# EAGLE board controller-ha-v3 (EAGLE 6.5.0), part 1 of 2
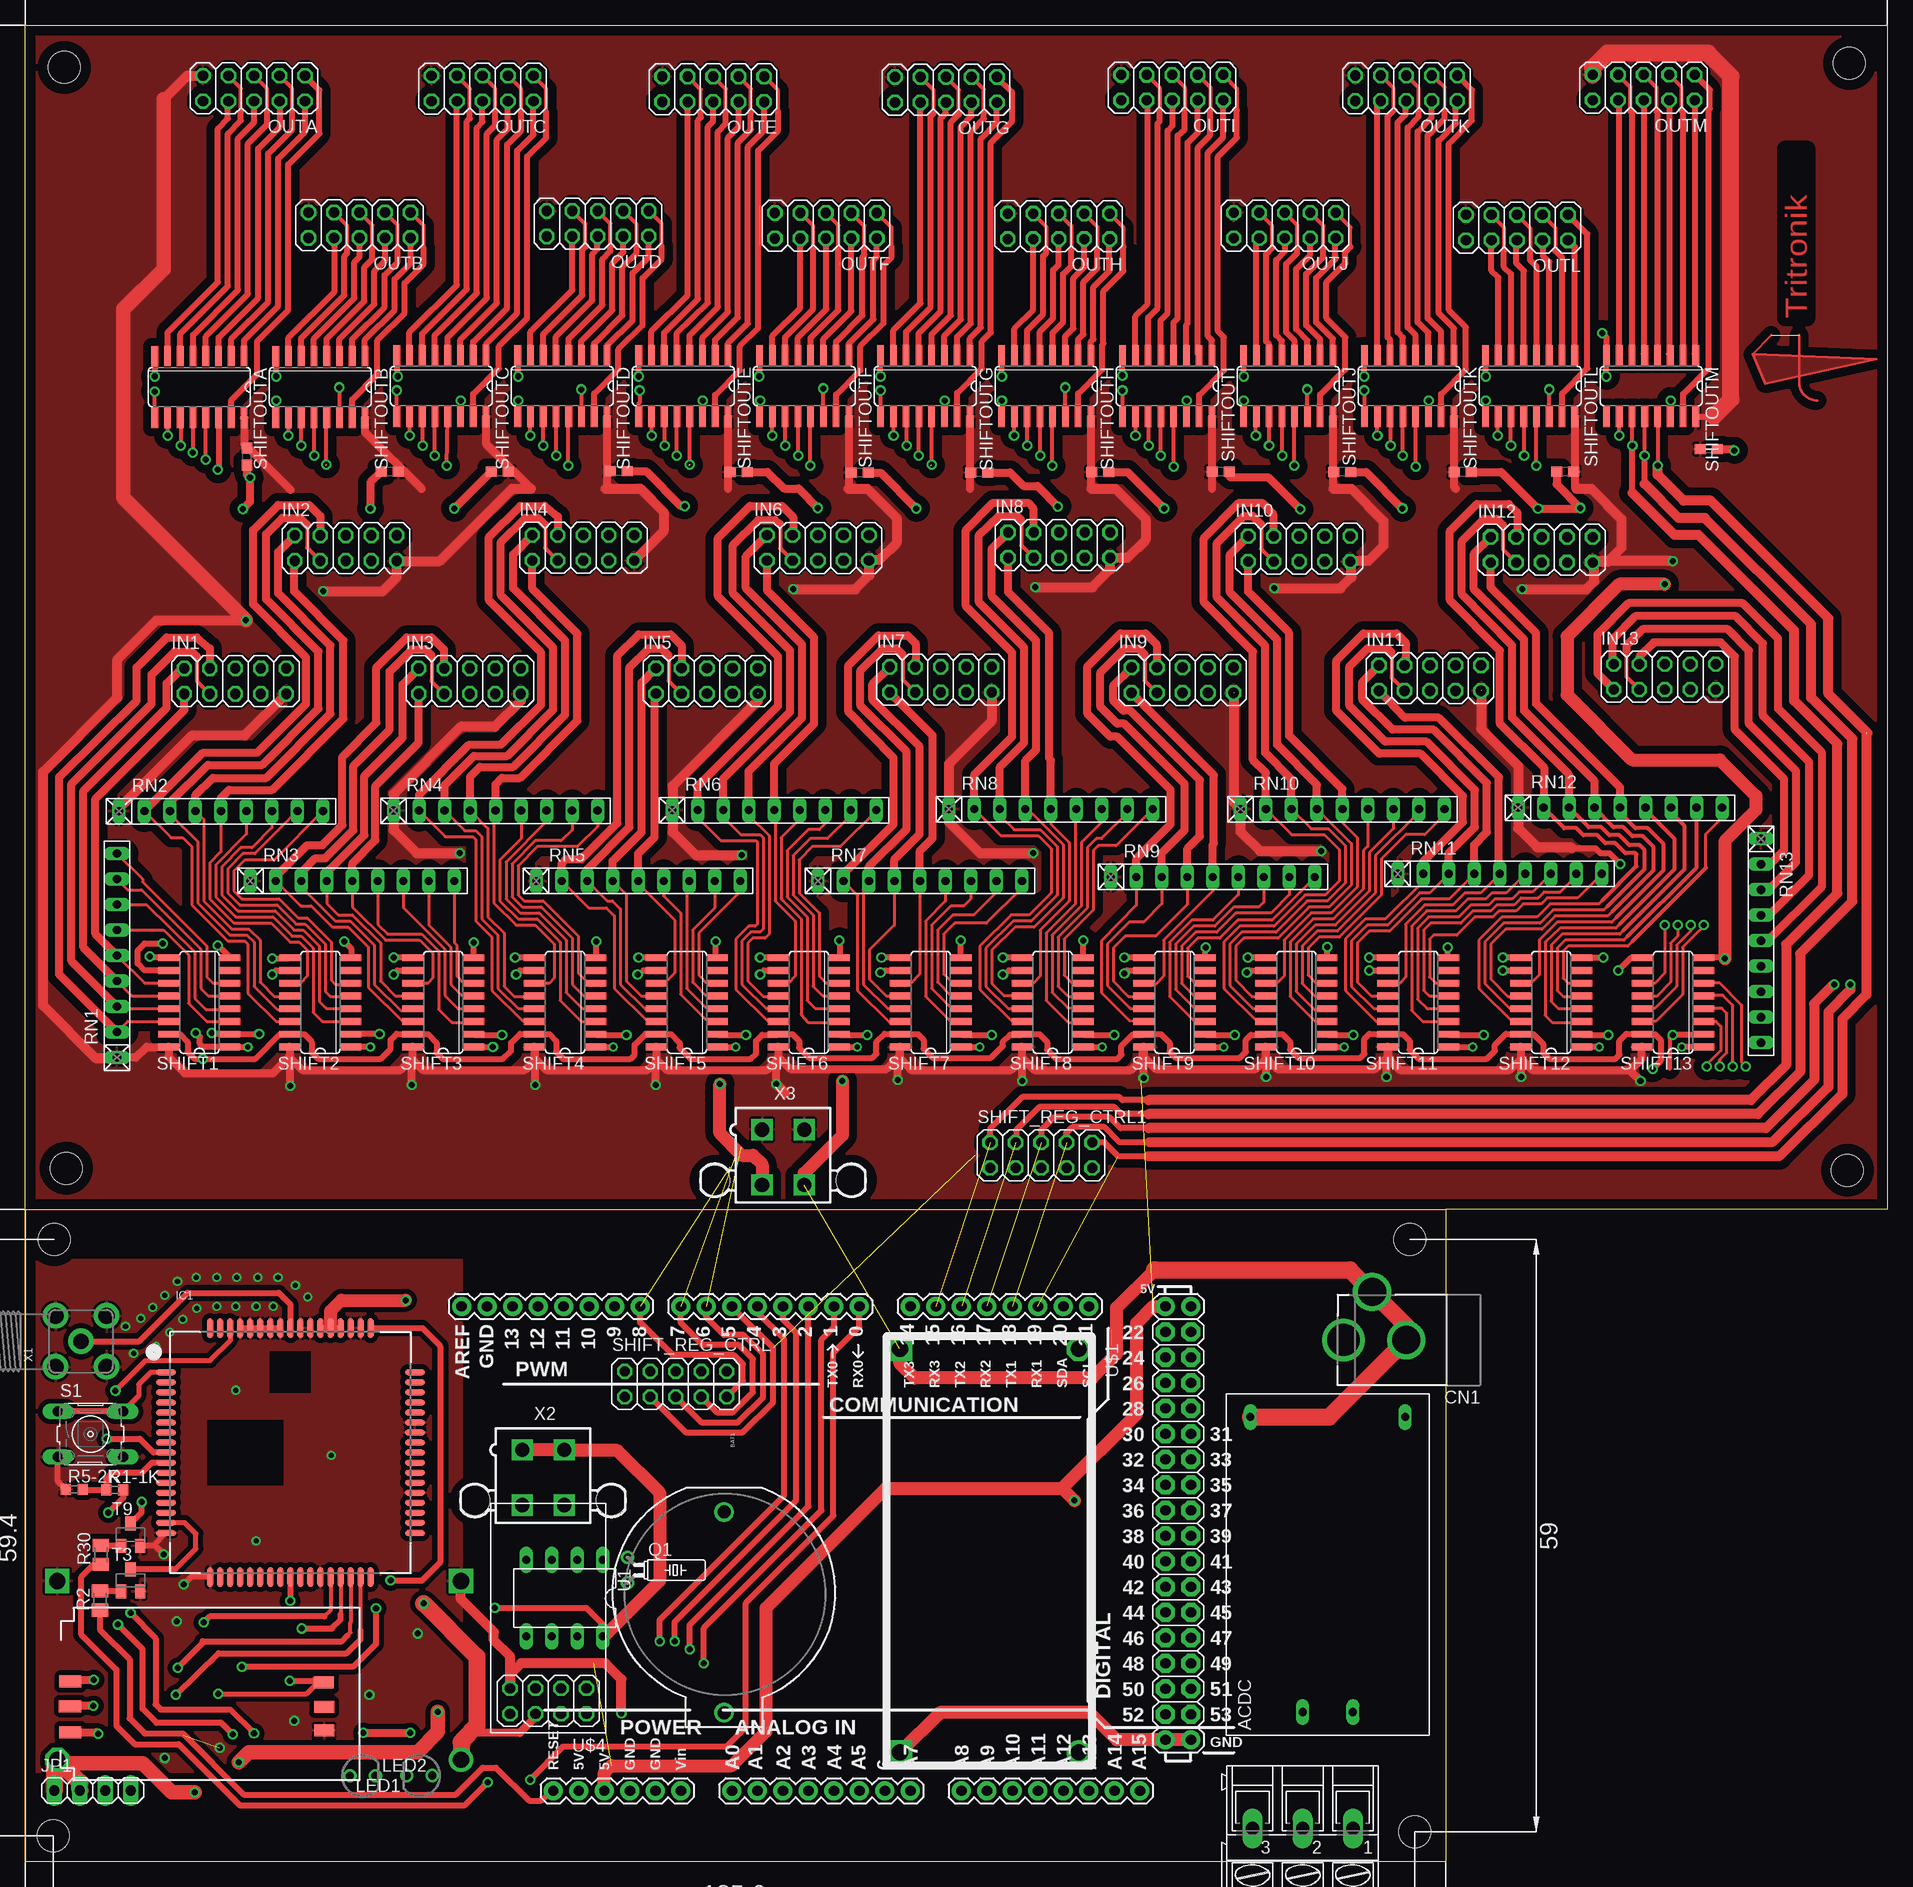
[diagram p0: board, top side]
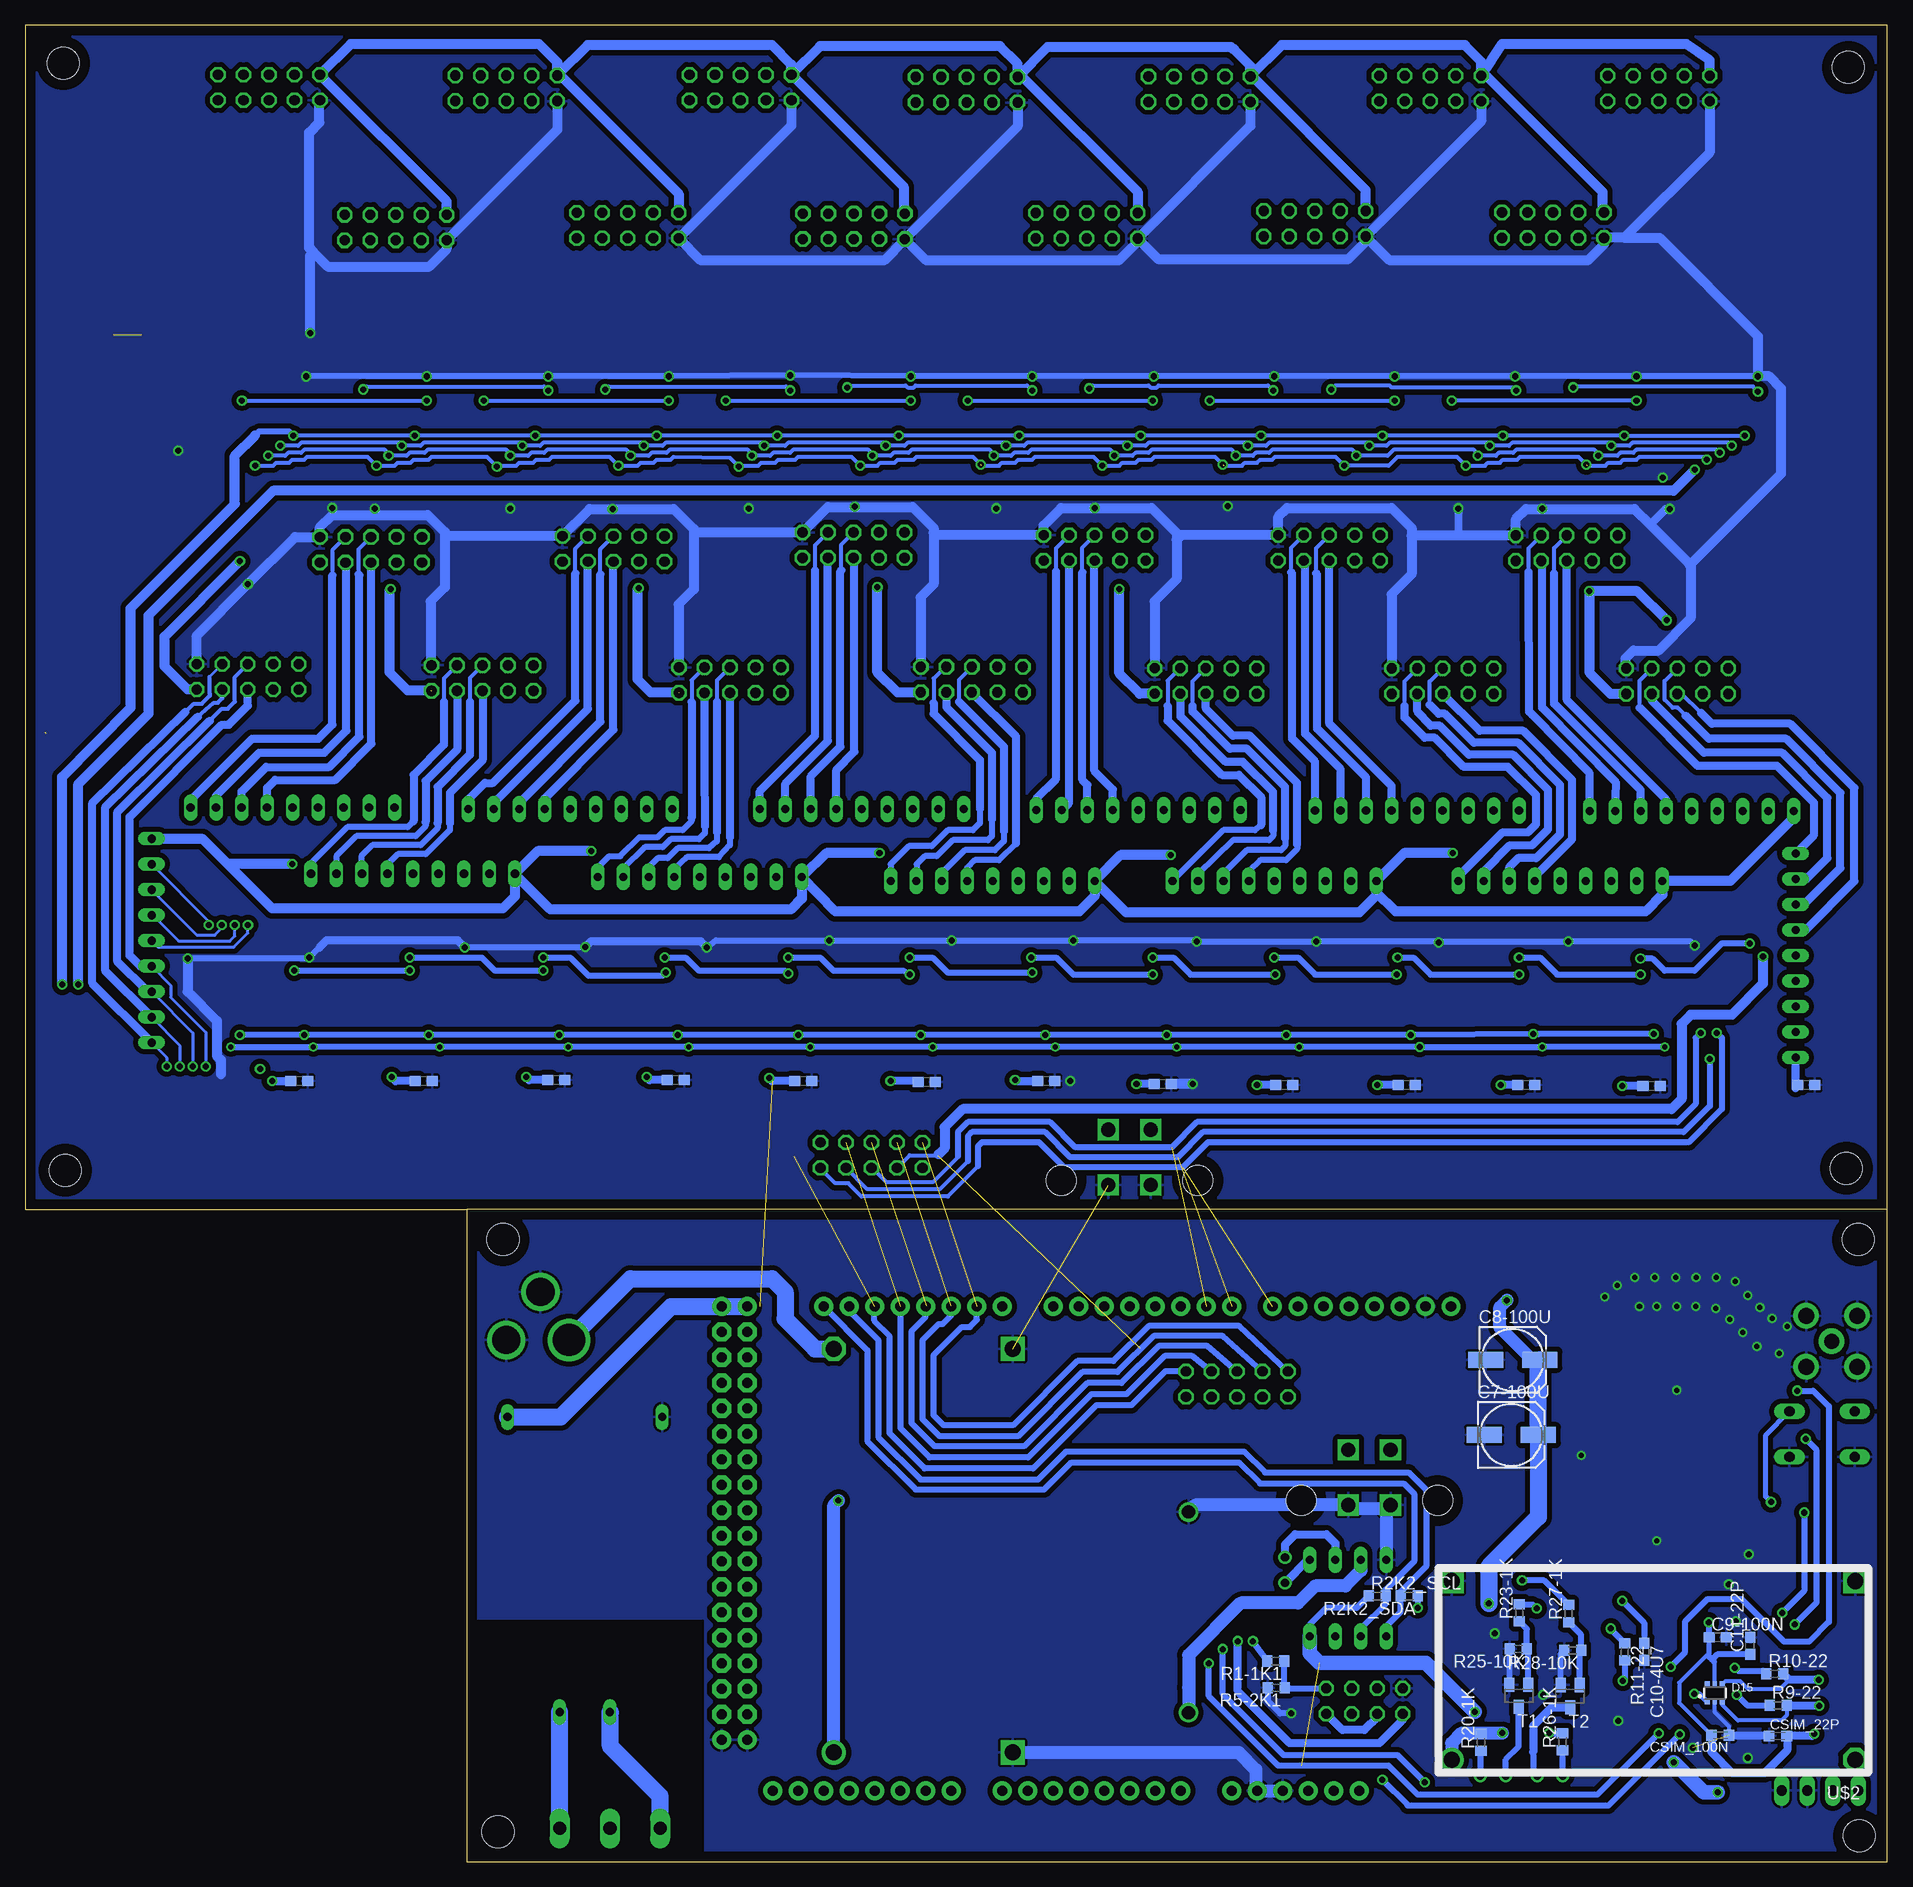
[diagram p1: board, bottom side, seen from below]

Size 185.5 x 183 mm. Coordinates in mm from the lower left corner, seen from the top.
Outline: 0,65 0,0 141.5,0 141.5,65
Outline: 0,65 141.5,65
Outline: 141.5,65 185.5,65 185.5,183 0,183 0,65
Copper layers (1*16): Top 0.035mm / dielectric 1.5mm / Bottom 0.035mm
Design rules "default": minimum track width 10mil, minimum drill 24mil, track to track 8mil, track to pad 8mil, pad to pad 8mil, via to via 8mil, smd to smd 8mil, copper to edge 40mil, drill to drill 8mil, minimum pad ring 10mil, minimum via ring 8mil, stop-mask expansion 4mil, vias tented up to drill 0mil, thermal gap 10mil
Net classes: 1 power: width 0.305 mm, drill 0.6 mm, clearance 0.813 mm; 2 GND: width 0.305 mm, drill 0.6 mm, clearance 0.508 mm; 3 LIVEAC: width 0.508 mm, drill 0.508 mm, clearance 1.27 mm
Holes 3.2 mm at 2.8,2.6 137.9,62 2.9,62 138.4,3 181.5,68.9 4.1,69.1 3.9,178.8 181.7,179.2

## Footprints (pad centres in the part's own frame; a part is rotated, then mirrored left to right if it is on the bottom)
AK3003 = drill 1.321 long: 1 -5.004,0; 2 0,0; 3 5.004,0
HLK-PM01 = drill 0.8 long: AC$1 -14.7,2.5; AC$2 -14.7,-2.5; GND 14.7,7.7; VOUT 14.7,-7.7
BATTCOM_20MM_PTH = drill 1.3: 1 11.85,0; 2 -8.15,0
153CLV-0605 = smd 3.5 x 1.6: + 2.7,0; - -2.7,0
C0603 = smd 1.1 x 1: 1 -0.85,0; 2 0.85,0
DCJACK_2MM_PTH = drill 2.8: GND 0,7.35; GNDBREAK 4.8,10.75 | drill 3.2: PWR 0,13.6
C0603K = smd 1.05 x 1.08: 1 -0.875,0; 2 0.875,0
SOT363 = smd 0.5 x 0.5: 1 -0.75,-0.9; 3 0.75,-0.9; 4 0.75,0.9; 6 -0.75,0.9 | smd 0.4 x 0.5: 2 0,-0.9; 5 0,0.9
SIM900_SMT = smd 2 x 0.6: P$1 -12.4,8; P$2 -12.4,7; P$3 -12.4,6; P$4 -12.4,5; P$5 -12.4,4; P$6 -12.4,3; P$7 -12.4,2; P$8 -12.4,1; P$9 -12.4,0; P$10 -12.4,-1; P$11 -12.4,-2; P$12 -12.4,-3; P$13 -12.4,-4; P$14 -12.4,-5; P$15 -12.4,-6; P$16 -12.4,-7; P$17 -12.4,-8; P$35 12.4,-8; P$36 12.4,-7; P$37 12.4,-6; P$38 12.4,-5; P$39 12.4,-4; P$40 12.4,-3; P$41 12.4,-2; P$42 12.4,-1; P$43 12.4,0; P$44 12.4,1; P$45 12.4,2; P$46 12.4,3; P$47 12.4,4; P$48 12.4,5; P$49 12.4,6; P$50 12.4,7; P$51 12.4,8 | smd 0.6 x 2: P$18 -8,-12.4; P$19 -7,-12.4; P$20 -6,-12.4; P$21 -5,-12.4; P$22 -4,-12.4; P$23 -3,-12.4; P$24 -2,-12.4; P$25 -1,-12.4; P$26 0,-12.4; P$27 1,-12.4; P$28 2,-12.4; P$29 3,-12.4; P$30 4,-12.4; P$31 5,-12.4; P$32 6,-12.4; P$33 7,-12.4; P$34 8,-12.4; P$52 8,12.4; P$53 7,12.4; P$54 6,12.4; P$55 5,12.4; P$56 4,12.4; P$57 3,12.4; P$58 2,12.4; P$59 1,12.4; P$60 0,12.4; P$61 -1,12.4; P$62 -2,12.4; P$63 -3,12.4; P$64 -4,12.4; P$65 -5,12.4; P$66 -6,12.4; P$67 -7,12.4; P$68 -8,12.4
2X05 = drill 1.016 octagon: 1 -5.08,-1.27; 2 -5.08,1.27; 3 -2.54,-1.27; 4 -2.54,1.27; 5 0,-1.27; 6 0,1.27; 7 2.54,-1.27; 8 2.54,1.27; 9 5.08,-1.27; 10 5.08,1.27
1X04 = drill 1.016 long: 1 -3.81,0; 2 -1.27,0; 3 1.27,0; 4 3.81,0
LED3MM-NS = drill 0.813: A -1.27,0; K 1.27,0
TC26H = drill 0.813: 1 -1.27,0; 2 1.27,0
R0603 = smd 1 x 1.1: 1 -0.85,0; 2 0.85,0
M0805 = smd 1.3 x 1.6: 1 -0.95,0; 2 0.95,0
RN-9 = drill 0.813 long: 1 -10.16,0; 2 -7.62,0; 3 -5.08,0; 4 -2.54,0; 5 0,0; 6 2.54,0; 7 5.08,0; 8 7.62,0; 9 10.16,0
B3F-10XX = drill 1.016 long: 1 -3.251,2.261; 2 3.251,2.261; 3 -3.251,-2.261; 4 3.251,-2.261
SO16 = smd 0.66 x 2.032: 1 -4.445,-3.073; 2 -3.175,-3.073; 3 -1.905,-3.073; 4 -0.635,-3.073; 5 0.635,-3.073; 6 1.905,-3.073; 7 3.175,-3.073; 8 4.445,-3.073; 9 4.445,3.073; 10 3.175,3.073; 11 1.905,3.073; 12 0.635,3.073; 13 -0.635,3.073; 14 -1.905,3.073; 15 -3.175,3.073; 16 -4.445,3.073
SOT23-BEC = smd 1 x 1.4: B -0.95,-1.1; C 0,1.1; E 0.95,-1.1
DIL08 = drill 0.813 long: 1 -3.81,-3.81; 2 -1.27,-3.81; 3 1.27,-3.81; 4 3.81,-3.81; 5 3.81,3.81; 6 1.27,3.81; 7 -1.27,3.81; 8 -3.81,3.81
ARDUINO_MEGA = drill 1.016 pad 1.88: 0 63.5,50.8; 1 60.96,50.8; 2 58.42,50.8; 3 55.88,50.8; 3.3V 35.56,2.54; 4 53.34,50.8; 5 50.8,50.8; 5V@0 38.1,2.54; 5V@1 93.98,50.8; 5V@2 96.52,50.8; 6 48.26,50.8; 7 45.72,50.8; 8 41.656,50.8; 9 39.116,50.8; 10 36.576,50.8; 11 34.036,50.8; 12 31.496,50.8; 13 28.956,50.8; 14 68.58,50.8; 15 71.12,50.8; 16 73.66,50.8; 17 76.2,50.8; 18 78.74,50.8; 19 81.28,50.8; 20 83.82,50.8; 21 86.36,50.8; A0 50.8,2.54; A1 53.34,2.54; A2 55.88,2.54; A3 58.42,2.54; A4 60.96,2.54; A5 63.5,2.54; A6 66.04,2.54; A7 68.58,2.54; A8 73.66,2.54; A9 76.2,2.54; A10 78.74,2.54; A11 81.28,2.54; A12 83.82,2.54; A13 86.36,2.54; A14 88.9,2.54; A15 91.44,2.54; AREF 23.876,50.8; GND@0 40.64,2.54; GND@1 43.18,2.54; GND@2 93.98,7.62; GND@3 96.52,7.62; GND@4 26.416,50.8; RESET 33.02,2.54; VIN 45.72,2.54 | drill 1.016 pad 1.88 octagon: 22 93.98,48.26; 23 96.52,48.26; 24 93.98,45.72; 25 96.52,45.72; 26 93.98,43.18; 27 96.52,43.18; 28 93.98,40.64; 29 96.52,40.64; 30 93.98,38.1; 31 96.52,38.1; 32 93.98,35.56; 33 96.52,35.56; 34 93.98,33.02; 35 96.52,33.02; 36 93.98,30.48; 37 96.52,30.48; 38 93.98,27.94; 39 96.52,27.94; 40 93.98,25.4; 41 96.52,25.4; 42 93.98,22.86; 43 96.52,22.86; 44 93.98,20.32; 45 96.52,20.32; 46 93.98,17.78; 47 96.52,17.78; 48 93.98,15.24; 49 96.52,15.24; 50 93.98,12.7; 51 96.52,12.7; 52 93.98,10.16; 53 96.52,10.16
DCDCMODULE = drill 1.6 square: GND#0 1.7,1.7; GND#1 41.9,1.7 | drill 1.6 octagon: VIN 1.7,19.5 | drill 1.6: VOUT 41.9,19.5
ESP8266 = drill 1.016 octagon: CHPD 1.27,1.27; GND 3.81,-1.27; IO0 -1.27,-1.27; IO2 1.27,-1.27; RST -1.27,1.27; RXD -3.81,-1.27; TXD 3.81,1.27; VCC -3.81,1.27
SIMHOLDER3 = smd 2.2 x 1.2: 1 0.95,4.81; 2 0.91,7.41; 3 0.95,9.86 | smd 2 x 1.2: 4 26.2,9.78; 5 26.22,7.34; 6 26.22,4.98
SMA90_DIP = drill 1.5 pad 2.54: ANTENNA 0,0 | drill 1.6 pad 2.54: GND1 -2.54,2.54; GND2 2.54,2.54; GND3 -2.54,-2.54; GND4 2.54,-2.54
5566-4 = drill 1.4 square: 1 2.1,-2.75; 2 -2.1,-2.75; 3 2.1,2.75; 4 -2.1,2.75 | hole 3: 6.8,2.29; -6.8,2.29

## Placement (x,y rotation side)
AC_IN  AK3003  [AK3003]  127.25,3.34 180 top
ACDC  HLK-PM01  [HLK-PM01]  129.75,29.63 90 top
BAT1  [BATTCOM_20MM_PTH]  69.62,26.72 270 top
C7-100U  [153CLV-0605]  37.47,42.54 0 bottom
C8-100U  [153CLV-0605]  37.33,50.02 0 bottom
C9-100N  [C0603]  16.92,22.39 0 bottom
C9-100N1  [C0603]  8.1,77.4 180 bottom
C9-100N2  [C0603]  23.5,77.3 180 bottom
C9-100N3  [C0603]  36,77.4 180 bottom
C9-100N4  [C0603]  47.9,77.4 180 bottom
C9-100N5  [C0603]  60.1,77.4 180 bottom
C9-100N6  [C0603]  72.2,77.5 180 bottom
C9-100N7  [C0603]  83.8,77.8 180 bottom
C9-100N8  [C0603]  95.7,77.7 180 bottom
C9-100N9  [C0603]  108,77.8 180 bottom
C9-100N10  [C0603]  120.7,77.9 180 bottom
C9-100N11  [C0603]  132.6,77.9 180 bottom
C9-100N12  [C0603]  145.8,77.8 180 bottom
C9-100N13  [C0603]  158.2,77.8 180 bottom
C9-100N14  [C0603]  22.1,140 90 top
C9-100N15  [C0603]  36.32,138.53 0 top
C9-100N16  [C0603]  47.29,138.53 0 top
C9-100N17  [C0603]  59.12,138.55 180 top
C9-100N18  [C0603]  71.06,138.48 180 top
C9-100N19  [C0603]  83.14,138.4 180 top
C9-100N20  [C0603]  95.04,138.43 180 top
C9-100N21  [C0603]  107.1,138.45 180 top
C9-100N22  [C0603]  119.08,138.49 180 top
C9-100N23  [C0603]  131.19,138.48 180 top
C9-100N24  [C0603]  143.19,138.47 180 top
C9-100N25  [C0603]  153.39,138.52 0 top
C9-100N26  [C0603]  167.7,140.77 180 top
C10-4U7  [C0603]  24.21,20.93 270 bottom
C11-22P  [C0603]  13.68,21.53 90 bottom
CN1  [DCJACK_2MM_PTH]  144.92,51.99 90 top
CSIM_22P  [C0603K]  10.91,12.54 0 bottom
CSIM_100N  [C0603K]  16.65,12.61 180 bottom
D15  [SOT363]  17.19,16.83 0 bottom
IC1  [SIM900_SMT]  26.42,40.78 0 top
IN1  [2X05]  20.94,117.64 0 top
IN2  [2X05]  31.94,130.89 0 top
IN3  [2X05]  44.29,117.64 0 top
IN4  [2X05]  55.6,130.92 0 top
IN5  [2X05]  67.91,117.66 0 top
IN6  [2X05]  78.97,130.91 0 top
IN7  [2X05]  91.2,117.79 0 top
IN8  [2X05]  102.99,131.19 0 top
IN9  [2X05]  115.29,117.74 0 top
IN10  [2X05]  126.9,130.82 0 top
IN11  [2X05]  139.94,117.95 0 top
IN12  [2X05]  151.05,130.73 0 top
IN13  [2X05]  163.32,118.07 0 top
JP1  [1X04]  6.72,7.12 0 top
LED1  [LED3MM-NS]  39.29,8.6 180 top
LED2  [LED3MM-NS]  33.62,8.58 0 top
OUTA  [2X05]  22.79,176.69 180 top
OUTB  [2X05]  33.31,163.06 180 top
OUTC  [2X05]  45.55,176.68 180 top
OUTD  [2X05]  57.04,163.21 180 top
OUTE  [2X05]  68.53,176.62 180 top
OUTF  [2X05]  79.76,163.01 180 top
OUTG  [2X05]  91.72,176.56 180 top
OUTH  [2X05]  102.95,162.95 180 top
OUTI  [2X05]  114.25,176.77 180 top
OUTJ  [2X05]  125.47,163.03 180 top
OUTK  [2X05]  137.57,176.71 180 top
OUTL  [2X05]  148.59,162.83 180 top
OUTM  [2X05]  161.21,176.78 180 top
Q1  [TC26H]  60.01,29.07 270 top
R1-1K  [R0603]  8.93,37.08 0 top
R1-1K1  [R0603]  60.95,20.01 180 bottom
R2  R120  [M0805]  7.46,26.04 90 top
R2K2_SCL  [R0603]  50.83,26.49 0 bottom
R2K2_SDA  [R0603]  47.64,26.49 180 bottom
R5-2K  [R0603]  4.88,37.12 0 top
R5-2K1  [R0603]  60.9,17.34 0 bottom
R9-22  [R0603]  10.89,15.59 0 bottom
R10-22  [R0603]  11.23,18.74 0 bottom
R11-22  [R0603]  26.16,20.92 270 bottom
R20-1K  [R0603]  40.49,11.9 90 bottom
R23-1K  [R0603]  36.67,24.81 90 bottom
R25-10K  [R0603]  36.76,21.24 180 bottom
R26-1K  [R0603]  32.37,11.97 90 bottom
R27-1K  [R0603]  31.76,24.74 90 bottom
R28-10K  [R0603]  31.36,21.08 180 bottom
R30  R120  [M0805]  7.55,30.59 90 top
RN1  [RN-9]  9.15,90.3 90 top
RN2  [RN-9]  19.51,104.69 0 top
RN3  [RN-9]  32.59,97.74 0 top
RN4  [RN-9]  46.86,104.74 0 top
RN5  [RN-9]  61.06,97.74 0 top
RN6  [RN-9]  74.61,104.79 0 top
RN7  [RN-9]  89.13,97.74 0 top
RN8  [RN-9]  102.16,104.89 0 top
RN9  [RN-9]  118.3,98.14 0 top
RN10  [RN-9]  131.21,104.89 0 top
RN11  [RN-9]  146.87,98.44 0 top
RN12  [RN-9]  158.86,105.04 0 top
RN13  [RN-9]  172.9,91.78 270 top
S1  [B3F-10XX]  6.51,42.62 0 top
SHIFT1  74HC165D  [SO16]  17.36,85.64 90 top
SHIFT2  74HC165D  [SO16]  29.41,85.64 90 top
SHIFT3  74HC165D  [SO16]  41.64,85.64 90 top
SHIFT4  74HC165D  [SO16]  53.78,85.64 90 top
SHIFT5  74HC165D  [SO16]  65.92,85.64 90 top
SHIFT6  74HC165D  [SO16]  78.06,85.64 90 top
SHIFT7  74HC165D  [SO16]  90.2,85.64 90 top
SHIFT8  74HC165D  [SO16]  102.34,85.64 90 top
SHIFT9  74HC165D  [SO16]  114.48,85.64 90 top
SHIFT10  74HC165D  [SO16]  126.62,85.64 90 top
SHIFT11  74HC165D  [SO16]  138.76,85.64 90 top
SHIFT12  74HC165D  [SO16]  152,85.64 90 top
SHIFT13  74HC165D  [SO16]  164.14,85.64 90 top
SHIFT_REG_CTRL  [2X05]  64.8,47.6 0 top
SHIFT_REG_CTRL1  [2X05]  101.2,70.4 0 top
SHIFTOUTA  74HC595D  [SO16]  17.36,146.94 180 top
SHIFTOUTB  74HC595D  [SO16]  29.41,146.94 180 top
SHIFTOUTC  74HC595D  [SO16]  41.46,147.04 180 top
SHIFTOUTD  74HC595D  [SO16]  53.51,147.04 180 top
SHIFTOUTE  74HC595D  [SO16]  65.56,147.04 180 top
SHIFTOUTF  74HC595D  [SO16]  77.61,147.04 180 top
SHIFTOUTG  74HC595D  [SO16]  89.66,147.04 180 top
SHIFTOUTH  74HC595D  [SO16]  101.71,147.04 180 top
SHIFTOUTI  74HC595D  [SO16]  113.76,147.04 180 top
SHIFTOUTJ  74HC595D  [SO16]  125.81,147.04 180 top
SHIFTOUTK  74HC595D  [SO16]  137.86,147.04 180 top
SHIFTOUTL  74HC595D  [SO16]  149.91,147.04 180 top
SHIFTOUTM  74HC595D  [SO16]  161.96,147.04 180 top
T1  [SOT23-BEC]  36.71,16.56 180 bottom
T2  [SOT23-BEC]  31.61,16.52 180 bottom
T3  [SOT23-BEC]  10.5,28.06 0 top
T9  [SOT23-BEC]  10.5,32.61 0 top
U1  DS1307  [DIL08]  53.73,26.28 180 top
U3  ARDUINO-MEGAFULL  [ARDUINO_MEGA]  19.6,4.54 0 top
U$1  DCDCMODULE  [DCDCMODULE]  85.44,52.8 270 top
U$2  DCDCMODULE  [DCDCMODULE]  1.52,29.68 180 bottom
U$4  ESP8266  [ESP8266]  52.1,16.03 180 top
U$5  SIMHOLDER3  [SIMHOLDER3]  3.56,8.11 0 top
X1  [SMA90_DIP]  5.57,51.86 90 top
X2  5566-4  [5566-4]  51.6,38.3 180 top
X3  5566-4  [5566-4]  75.5,70.2 180 top

## Library data of the parts
AC_IN = con-ptr500
ACDC U$1 U$2 = bontor
BAT1 = SparkFun-Electromechanical
C7-100U C8-100U C9-100N C9-100N1-C9-100N26 C10-4U7 C11-22P CSIM_22P CSIM_100N R1-1K R1-1K1 R2K2_SCL R2K2_SDA R5-2K R5-2K1 R9-22 R10-22 R11-22 R20-1K R23-1K R25-10K R26-1K R27-1K R28-10K = rcl
CN1 U1 = adafruit
D15 IC1 X1 = microbuilder
IN1-IN13 JP1 OUTA OUTB OUTC OUTD OUTE OUTF OUTG OUTH OUTI OUTJ OUTK OUTL OUTM SHIFT_REG_CTRL SHIFT_REG_CTRL1 = pinhead
LED1 LED2 = SparkFun-LED
Q1 = crystal; OC_FARNELL: unknown; OC_NEWARK: unknown
R2 R30 = resistor
RN1-RN13 = resistor-net; OC_FARNELL: unknown; OC_NEWARK: unknown
S1 = switch-omron; MPN: B3F-1000; OC_FARNELL: 176432; OC_NEWARK: 36M3542
SHIFT1-SHIFT13 SHIFTOUTA SHIFTOUTB SHIFTOUTC SHIFTOUTD SHIFTOUTE SHIFTOUTF SHIFTOUTG SHIFTOUTH SHIFTOUTI SHIFTOUTJ SHIFTOUTK SHIFTOUTL SHIFTOUTM = 74xx-eu
T1 T2 = transistor
T3 T9 = transistor-neu-to92
U3 = SparkFun-Boards
U$4 = tigorcustom
U$5 = SparkFun
X2 X3 = con-molex; OC_FARNELL: unknown; OC_NEWARK: unknown

## Nets
1-1: IN1.1 RN1.5 SHIFT1.11
1-2: IN1.2 RN1.4 SHIFT1.12
1-3: IN1.3 RN1.3 SHIFT1.13
1-4: IN1.4 RN1.2 SHIFT1.14
1-5: IN1.5 RN1.6 SHIFT1.3
1-6: IN1.6 RN1.7 SHIFT1.4
1-7: IN1.7 RN1.8 SHIFT1.5
1-8: IN1.8 RN1.9 SHIFT1.6
2-1: IN2.1 RN2.5 SHIFT2.11
2-2: IN2.2 RN2.4 SHIFT2.12
2-3: IN2.3 RN2.3 SHIFT2.13
2-4: IN2.4 RN2.2 SHIFT2.14
2-5: IN2.5 RN2.6 SHIFT2.3
2-6: IN2.6 RN2.7 SHIFT2.4
2-7: IN2.7 RN2.8 SHIFT2.5
2-8: IN2.8 RN2.9 SHIFT2.6
3-1: IN3.1 RN3.5 SHIFT3.11
3-2: IN3.2 RN3.4 SHIFT3.12
3-3: IN3.3 RN3.3 SHIFT3.13
3-4: IN3.4 RN3.2 SHIFT3.14
3-5: IN3.5 RN3.6 SHIFT3.3
3-6: IN3.6 RN3.7 SHIFT3.4
3-7: IN3.7 RN3.8 SHIFT3.5
3-8: IN3.8 RN3.9 SHIFT3.6
4-1: IN4.1 RN4.5 SHIFT4.11
4-2: IN4.2 RN4.4 SHIFT4.12
4-3: IN4.3 RN4.3 SHIFT4.13
4-4: IN4.4 RN4.2 SHIFT4.14
4-5: IN4.5 RN4.6 SHIFT4.3
4-6: IN4.6 RN4.7 SHIFT4.4
4-7: IN4.7 RN4.8 SHIFT4.5
4-8: IN4.8 RN4.9 SHIFT4.6
5-1: IN5.1 RN5.5 SHIFT5.11
5-2: IN5.2 RN5.4 SHIFT5.12
5-3: IN5.3 RN5.3 SHIFT5.13
5-4: IN5.4 RN5.2 SHIFT5.14
5-5: IN5.5 RN5.6 SHIFT5.3
5-6: IN5.6 RN5.7 SHIFT5.4
5-7: IN5.7 RN5.8 SHIFT5.5
5-8: IN5.8 RN5.9 SHIFT5.6
6-1: IN6.1 RN6.5 SHIFT6.11
6-2: IN6.2 RN6.4 SHIFT6.12
6-3: IN6.3 RN6.3 SHIFT6.13
6-4: IN6.4 RN6.2 SHIFT6.14
6-5: IN6.5 RN6.6 SHIFT6.3
6-6: IN6.6 RN6.7 SHIFT6.4
6-7: IN6.7 RN6.8 SHIFT6.5
6-8: IN6.8 RN6.9 SHIFT6.6
7-1: IN7.1 RN7.5 SHIFT7.11
7-2: IN7.2 RN7.4 SHIFT7.12
7-3: IN7.3 RN7.3 SHIFT7.13
7-4: IN7.4 RN7.2 SHIFT7.14
7-5: IN7.5 RN7.6 SHIFT7.3
7-6: IN7.6 RN7.7 SHIFT7.4
7-7: IN7.7 RN7.8 SHIFT7.5
7-8: IN7.8 RN7.9 SHIFT7.6
8-1: IN8.1 RN8.5 SHIFT8.11
8-2: IN8.2 RN8.4 SHIFT8.12
8-3: IN8.3 RN8.3 SHIFT8.13
8-4: IN8.4 RN8.2 SHIFT8.14
8-5: IN8.5 RN8.6 SHIFT8.3
8-6: IN8.6 RN8.7 SHIFT8.4
8-7: IN8.7 RN8.8 SHIFT8.5
8-8: IN8.8 RN8.9 SHIFT8.6
9-1: IN9.1 RN9.5 SHIFT9.11
9-2: IN9.2 RN9.4 SHIFT9.12
9-3: IN9.3 RN9.3 SHIFT9.13
9-4: IN9.4 RN9.2 SHIFT9.14
9-5: IN9.5 RN9.6 SHIFT9.3
9-6: IN9.6 RN9.7 SHIFT9.4
9-7: IN9.7 RN9.8 SHIFT9.5
9-8: IN9.8 RN9.9 SHIFT9.6
10-1: IN10.1 RN10.5 SHIFT10.11
10-2: IN10.2 RN10.4 SHIFT10.12
10-3: IN10.3 RN10.3 SHIFT10.13
10-4: IN10.4 RN10.2 SHIFT10.14
10-5: IN10.5 RN10.6 SHIFT10.3
10-6: IN10.6 RN10.7 SHIFT10.4
10-7: IN10.7 RN10.8 SHIFT10.5
10-8: IN10.8 RN10.9 SHIFT10.6
11-1: IN11.1 RN11.5 SHIFT11.11
11-2: IN11.2 RN11.4 SHIFT11.12
11-3: IN11.3 RN11.3 SHIFT11.13
11-4: IN11.4 RN11.2 SHIFT11.14
11-5: IN11.5 RN11.6 SHIFT11.3
11-6: IN11.6 RN11.7 SHIFT11.4
11-7: IN11.7 RN11.8 SHIFT11.5
11-8: IN11.8 RN11.9 SHIFT11.6
12-1: IN12.1 RN12.5 SHIFT12.11
12-2: IN12.2 RN12.4 SHIFT12.12
12-3: IN12.3 RN12.3 SHIFT12.13
12-4: IN12.4 RN12.2 SHIFT12.14
12-5: IN12.5 RN12.6 SHIFT12.3
12-6: IN12.6 RN12.7 SHIFT12.4
12-7: IN12.7 RN12.8 SHIFT12.5
12-8: IN12.8 RN12.9 SHIFT12.6
13-1: IN13.1 RN13.5 SHIFT13.11
13-2: IN13.2 RN13.4 SHIFT13.12
13-3: IN13.3 RN13.3 SHIFT13.13
13-4: IN13.4 RN13.2 SHIFT13.14
13-5: IN13.5 RN13.6 SHIFT13.3
13-6: IN13.6 RN13.7 SHIFT13.4
13-7: IN13.7 RN13.8 SHIFT13.5
13-8: IN13.8 RN13.9 SHIFT13.6
+3V3: C7-100U.+ C8-100U.+ IC1.P$55 IC1.P$56 IC1.P$57 R20-1K.2 R26-1K.2 U$2.VOUT U$4.CHPD U$4.VCC
+9V [GND]: CN1.PWR U$1.VIN
A-1: OUTA.1 SHIFTOUTA.15
A-2: OUTA.2 SHIFTOUTA.1
A-3: OUTA.3 SHIFTOUTA.2
A-4: OUTA.4 SHIFTOUTA.3
A-5: OUTA.5 SHIFTOUTA.4
A-6: OUTA.6 SHIFTOUTA.5
A-7: OUTA.7 SHIFTOUTA.6
A-8: OUTA.8 SHIFTOUTA.7
B-1: OUTB.1 SHIFTOUTB.15
B-2: OUTB.2 SHIFTOUTB.1
B-3: OUTB.3 SHIFTOUTB.2
B-4: OUTB.4 SHIFTOUTB.3
B-5: OUTB.5 SHIFTOUTB.4
B-6: OUTB.6 SHIFTOUTB.5
B-7: OUTB.7 SHIFTOUTB.6
B-8: OUTB.8 SHIFTOUTB.7
C-1: OUTC.1 SHIFTOUTC.15
C-2: OUTC.2 SHIFTOUTC.1
C-3: OUTC.3 SHIFTOUTC.2
C-4: OUTC.4 SHIFTOUTC.3
C-5: OUTC.5 SHIFTOUTC.4
C-6: OUTC.6 SHIFTOUTC.5
C-7: OUTC.7 SHIFTOUTC.6
C-8: OUTC.8 SHIFTOUTC.7
CE: SHIFT1.15 SHIFT2.15 SHIFT3.15 SHIFT4.15 SHIFT5.15 SHIFT6.15 SHIFT7.15 SHIFT8.15 SHIFT9.15 SHIFT10.15 SHIFT11.15 SHIFT12.15 SHIFT13.15 SHIFT_REG_CTRL1.7 SHIFT_REG_CTRL.7 U3.7
CLK: SHIFT1.2 SHIFT2.2 SHIFT3.2 SHIFT4.2 SHIFT5.2 SHIFT6.2 SHIFT7.2 SHIFT8.2 SHIFT9.2 SHIFT10.2 SHIFT11.2 SHIFT12.2 SHIFT13.2 SHIFT_REG_CTRL1.5 SHIFT_REG_CTRL.5 U3.6
D-1: OUTD.1 SHIFTOUTD.15
D-2: OUTD.2 SHIFTOUTD.1
D-3: OUTD.3 SHIFTOUTD.2
D-4: OUTD.4 SHIFTOUTD.3
D-5: OUTD.5 SHIFTOUTD.4
D-6: OUTD.6 SHIFTOUTD.5
D-7: OUTD.7 SHIFTOUTD.6
D-8: OUTD.8 SHIFTOUTD.7
DS_OE: SHIFT_REG_CTRL1.10 SHIFT_REG_CTRL.10 SHIFTOUTA.13 SHIFTOUTB.13 SHIFTOUTC.13 SHIFTOUTD.13 SHIFTOUTE.13 SHIFTOUTF.13 SHIFTOUTG.13 SHIFTOUTH.13 SHIFTOUTI.13 SHIFTOUTJ.13 SHIFTOUTK.13 SHIFTOUTL.13 SHIFTOUTM.13 U3.19
E-1: OUTE.1 SHIFTOUTE.15
E-2: OUTE.2 SHIFTOUTE.1
E-3: OUTE.3 SHIFTOUTE.2
E-4: OUTE.4 SHIFTOUTE.3
E-5: OUTE.5 SHIFTOUTE.4
E-6: OUTE.6 SHIFTOUTE.5
E-7: OUTE.7 SHIFTOUTE.6
E-8: OUTE.8 SHIFTOUTE.7
ESP_RX: R1-1K1.1 R5-2K1.2 U$4.RXD
ESP_TX: U3.3 U$4.TXD
F-1: OUTF.1 SHIFTOUTF.15
F-2: OUTF.2 SHIFTOUTF.1
F-3: OUTF.3 SHIFTOUTF.2
F-4: OUTF.4 SHIFTOUTF.3
F-5: OUTF.5 SHIFTOUTF.4
F-6: OUTF.6 SHIFTOUTF.5
F-7: OUTF.7 SHIFTOUTF.6
F-8: OUTF.8 SHIFTOUTF.7
G-1: OUTG.1 SHIFTOUTG.15
G-2: OUTG.2 SHIFTOUTG.1
G-3: OUTG.3 SHIFTOUTG.2
G-4: OUTG.4 SHIFTOUTG.3
G-5: OUTG.5 SHIFTOUTG.4
G-6: OUTG.6 SHIFTOUTG.5
G-7: OUTG.7 SHIFTOUTG.6
G-8: OUTG.8 SHIFTOUTG.7
GND [GND]: ACDC.GND BAT1.2 C7-100U.- C8-100U.- C9-100N1.1 C9-100N2.1 C9-100N3.1 C9-100N4.1 C9-100N5.1 C9-100N6.1 C9-100N7.1 C9-100N8.1 C9-100N9.1 C9-100N10.1 C9-100N11.1 C9-100N12.1 C9-100N13.1 C9-100N14.1 C9-100N15.1 C9-100N16.1 C9-100N17.1 C9-100N18.1 C9-100N19.1 C9-100N20.1 C9-100N21.1 C9-100N22.1 C9-100N23.1 C9-100N24.1 C9-100N25.1 C9-100N26.1 C9-100N.2 C10-4U7.2 C11-22P.2 CN1.GND CN1.GNDBREAK CSIM_22P.1 CSIM_100N.1 D15.2 IC1.P$17 IC1.P$18 IC1.P$29 IC1.P$39 IC1.P$45 IC1.P$46 IC1.P$53 IC1.P$54 IC1.P$58 IC1.P$59 IC1.P$61 IC1.P$62 IC1.P$63 IC1.P$64 IC1.P$65 IN1.10 IN2.10 IN3.10 IN4.10 IN5.10 IN6.10 IN7.10 IN8.10 IN9.10 IN10.10 IN11.10 IN12.10 IN13.10 JP1.3 JP1.4 OUTA.10 OUTB.10 OUTC.10 OUTD.10 OUTE.10 OUTF.10 OUTG.10 OUTH.10 OUTI.10 OUTJ.10 OUTK.10 OUTL.10 OUTM.10 R5-2K1.1 R5-2K.1 R25-10K.2 R28-10K.2 S1.3 S1.4 SHIFT1.8 SHIFT2.8 SHIFT3.8 SHIFT4.8 SHIFT5.8 SHIFT6.8 SHIFT7.8 SHIFT8.8 SHIFT9.8 SHIFT10.8 SHIFT11.8 SHIFT12.8 SHIFT13.8 SHIFTOUTA.8 SHIFTOUTB.8 SHIFTOUTC.8 SHIFTOUTD.8 SHIFTOUTE.8 SHIFTOUTF.8 SHIFTOUTG.8 SHIFTOUTH.8 SHIFTOUTI.8 SHIFTOUTJ.8 SHIFTOUTK.8 SHIFTOUTL.8 SHIFTOUTM.8 T1.E T2.E T3.E T9.E U1.4 U3.GND@0 U3.GND@1 U3.GND@2 U3.GND@3 U3.GND@4 U$1.GND#0 U$1.GND#1 U$2.GND#0 U$2.GND#1 U$4.GND U$5.6 X1.GND1 X1.GND2 X1.GND3 X1.GND4 X2.3 X2.4 X3.3 X3.4
GPIO11: IC1.P$67
GPIO12: IC1.P$68
H-1: OUTH.1 SHIFTOUTH.15
H-2: OUTH.2 SHIFTOUTH.1
H-3: OUTH.3 SHIFTOUTH.2
H-4: OUTH.4 SHIFTOUTH.3
H-5: OUTH.5 SHIFTOUTH.4
H-6: OUTH.6 SHIFTOUTH.5
H-7: OUTH.7 SHIFTOUTH.6
H-8: OUTH.8 SHIFTOUTH.7
I-1: OUTI.1 SHIFTOUTI.15
I-2: OUTI.2 SHIFTOUTI.1
I-3: OUTI.3 SHIFTOUTI.2
I-4: OUTI.4 SHIFTOUTI.3
I-5: OUTI.5 SHIFTOUTI.4
I-6: OUTI.6 SHIFTOUTI.5
I-7: OUTI.7 SHIFTOUTI.6
I-8: OUTI.8 SHIFTOUTI.7
J-1: OUTJ.1 SHIFTOUTJ.15
J-2: OUTJ.2 SHIFTOUTJ.1
J-3: OUTJ.3 SHIFTOUTJ.2
J-4: OUTJ.4 SHIFTOUTJ.3
J-5: OUTJ.5 SHIFTOUTJ.4
J-6: OUTJ.6 SHIFTOUTJ.5
J-7: OUTJ.7 SHIFTOUTJ.6
J-8: OUTJ.8 SHIFTOUTJ.7
K-1: OUTK.1 SHIFTOUTK.15
K-2: OUTK.2 SHIFTOUTK.1
K-3: OUTK.3 SHIFTOUTK.2
K-4: OUTK.4 SHIFTOUTK.3
K-5: OUTK.5 SHIFTOUTK.4
K-6: OUTK.6 SHIFTOUTK.5
K-7: OUTK.7 SHIFTOUTK.6
K-8: OUTK.8 SHIFTOUTK.7
L-1: OUTL.1 SHIFTOUTL.15
L-2: OUTL.2 SHIFTOUTL.1
L-3: OUTL.3 SHIFTOUTL.2
L-4: OUTL.4 SHIFTOUTL.3
L-5: OUTL.5 SHIFTOUTL.4
L-6: OUTL.6 SHIFTOUTL.5
L-7: OUTL.7 SHIFTOUTL.6
L-8: OUTL.8 SHIFTOUTL.7
M-1: OUTM.1 SHIFTOUTM.15
M-2: OUTM.2 SHIFTOUTM.1
M-3: OUTM.3 SHIFTOUTM.2
M-4: OUTM.4 SHIFTOUTM.3
M-5: OUTM.5 SHIFTOUTM.4
M-6: OUTM.6 SHIFTOUTM.5
M-7: OUTM.7 SHIFTOUTM.6
M-8: OUTM.8 SHIFTOUTM.7
N$1: R1-1K.2 U3.1
N$2: IC1.P$31 R11-22.1
N$3: IC1.P$32 R10-22.1
N$4: IC1.P$33 R9-22.1
N$5: C10-4U7.1 IC1.P$26
N$6: IC1.P$60 X1.ANTENNA
N$7: AC_IN.3 ACDC.AC$1
N$8: LED1.A R20-1K.1
N$9: LED1.K T1.C
N$10: R23-1K.1 R25-10K.1 T1.B
N$11: LED2.A R26-1K.1
N$12: LED2.K T2.C
N$13: R27-1K.1 R28-10K.1 T2.B
N$14: R30.2 T9.B
N$15: R2.2 T3.B
N$16: Q1.1 U1.2
N$17: AC_IN.1 ACDC.AC$2
N$18: SHIFT2.10 SHIFT3.9
N$19: Q1.2 U1.1
N$20: R1-1K1.2 U3.4
N$21: SHIFT3.10 SHIFT4.9
N$22: SHIFT4.10 SHIFT5.9
N$23: BAT1.1 U1.3
N$24: SHIFT5.10 SHIFT6.9
N$25: SHIFT7.10 SHIFT8.9
N$26: SHIFTOUTA.9 SHIFTOUTB.14
N$27: SHIFT8.10 SHIFT9.9
N$28: SHIFT12.10 SHIFT13.9
N$29: SHIFT11.10 SHIFT12.9
N$30: SHIFT10.10 SHIFT11.9
N$31: SHIFTOUTC.9 SHIFTOUTD.14
N$32: SHIFTOUTE.9 SHIFTOUTF.14
N$33: SHIFTOUTG.9 SHIFTOUTH.14
N$34: SHIFTOUTI.9 SHIFTOUTJ.14
N$35: SHIFTOUTK.9 SHIFTOUTL.14
N$36: SHIFT6.10 SHIFT7.9
N$37: SHIFTOUTB.9 SHIFTOUTC.14
N$38: SHIFTOUTD.9 SHIFTOUTE.14
N$39: SHIFTOUTF.9 SHIFTOUTG.14
N$40: SHIFTOUTH.9 SHIFTOUTI.14
N$41: SHIFTOUTJ.9 SHIFTOUTK.14
N$42: SHIFTOUTL.9 SHIFTOUTM.14
N$47: SHIFT_REG_CTRL.1
N$48: SHIFT_REG_CTRL1.1
N$50: SHIFT1.10 SHIFT2.9
N$121: SHIFT9.10 SHIFT10.9
PL: SHIFT1.1 SHIFT2.1 SHIFT3.1 SHIFT4.1 SHIFT5.1 SHIFT6.1 SHIFT7.1 SHIFT8.1 SHIFT9.1 SHIFT10.1 SHIFT11.1 SHIFT12.1 SHIFT13.1 SHIFT_REG_CTRL1.9 SHIFT_REG_CTRL.9 U3.8
PWRKEY: R30.1 U3.2
Q7: SHIFT1.9 SHIFT_REG_CTRL1.3 SHIFT_REG_CTRL.3 U3.5
RESET: R2.1 U3.RESET
SCL: R2K2_SCL.2 U1.6 U3.21
SDA: R2K2_SDA.2 U1.5 U3.20
SHCP: SHIFT_REG_CTRL1.2 SHIFT_REG_CTRL.2 SHIFTOUTA.11 SHIFTOUTB.11 SHIFTOUTC.11 SHIFTOUTD.11 SHIFTOUTE.11 SHIFTOUTF.11 SHIFTOUTG.11 SHIFTOUTH.11 SHIFTOUTI.11 SHIFTOUTJ.11 SHIFTOUTK.11 SHIFTOUTL.11 SHIFTOUTM.11 U3.15
SIM_NETLIGHT: IC1.P$52 R27-1K.2
SIM_PWRKEY: IC1.P$1 S1.1 S1.2 T9.C
SIM_RESET: IC1.P$16 T3.C
SIM_RX: IC1.P$10 R1-1K.1 R5-2K.2
SIM_STATUS: IC1.P$66 R23-1K.2
SIM_TX: IC1.P$9 U3.0
SR_DS: SHIFT_REG_CTRL1.6 SHIFT_REG_CTRL.6 SHIFTOUTA.14 U3.17
SR_RST: SHIFT_REG_CTRL1.8 SHIFT_REG_CTRL.8 SHIFTOUTA.10 SHIFTOUTB.10 SHIFTOUTC.10 SHIFTOUTD.10 SHIFTOUTE.10 SHIFTOUTF.10 SHIFTOUTG.10 SHIFTOUTH.10 SHIFTOUTI.10 SHIFTOUTJ.10 SHIFTOUTK.10 SHIFTOUTL.10 SHIFTOUTM.10 U3.18
STCP: SHIFT_REG_CTRL1.4 SHIFT_REG_CTRL.4 SHIFTOUTA.12 SHIFTOUTB.12 SHIFTOUTC.12 SHIFTOUTD.12 SHIFTOUTE.12 SHIFTOUTF.12 SHIFTOUTG.12 SHIFTOUTH.12 SHIFTOUTI.12 SHIFTOUTJ.12 SHIFTOUTK.12 SHIFTOUTL.12 SHIFTOUTM.12 U3.16
USIM_CLK: D15.4 R10-22.2 U$5.3
USIM_DATA: D15.1 R11-22.2 U$5.4
USIM_RESET: D15.3 R9-22.2 U$5.2
USIM_VCC: C9-100N.1 C11-22P.1 CSIM_22P.2 CSIM_100N.2 D15.5 IC1.P$30 U$5.1
VCC [power]: ACDC.VOUT C9-100N1.2 C9-100N2.2 C9-100N3.2 C9-100N4.2 C9-100N5.2 C9-100N6.2 C9-100N7.2 C9-100N8.2 C9-100N9.2 C9-100N10.2 C9-100N11.2 C9-100N12.2 C9-100N13.2 C9-100N14.2 C9-100N15.2 C9-100N16.2 C9-100N17.2 C9-100N18.2 C9-100N19.2 C9-100N20.2 C9-100N21.2 C9-100N22.2 C9-100N23.2 C9-100N24.2 C9-100N25.2 C9-100N26.2 IN1.9 IN2.9 IN3.9 IN4.9 IN5.9 IN6.9 IN7.9 IN8.9 IN9.9 IN10.9 IN11.9 IN12.9 IN13.9 JP1.1 JP1.2 OUTA.9 OUTB.9 OUTC.9 OUTD.9 OUTE.9 OUTF.9 OUTG.9 OUTH.9 OUTI.9 OUTJ.9 OUTK.9 OUTL.9 OUTM.9 R2K2_SCL.1 R2K2_SDA.1 RN1.1 RN2.1 RN3.1 RN4.1 RN5.1 RN6.1 RN7.1 RN8.1 RN9.1 RN10.1 RN11.1 RN12.1 RN13.1 SHIFT1.16 SHIFT2.16 SHIFT3.16 SHIFT4.16 SHIFT5.16 SHIFT6.16 SHIFT7.16 SHIFT8.16 SHIFT9.16 SHIFT10.16 SHIFT11.16 SHIFT12.16 SHIFT13.16 SHIFTOUTA.16 SHIFTOUTB.16 SHIFTOUTC.16 SHIFTOUTD.16 SHIFTOUTE.16 SHIFTOUTF.16 SHIFTOUTG.16 SHIFTOUTH.16 SHIFTOUTI.16 SHIFTOUTJ.16 SHIFTOUTK.16 SHIFTOUTL.16 SHIFTOUTM.16 U1.8 U3.5V@0 U3.5V@1 U3.5V@2 U$1.VOUT U$2.VIN X2.1 X2.2 X3.1 X3.2
VIN: U3.VIN

## Tracks (layer width: path | path; a pad name or v marks a point on that pad's centre or on a via)
1-1
  Top 0.305: RN1.5 11.9,87.55 SHIFT1.11
  Top 0.813: RN1.5 7,92.45 7,105.9 15.86,114.76 IN1.1
1-2
  Top 0.305: RN1.4 10.63,86.28 SHIFT1.12
  Top 0.813: RN1.4 5.8,91.11 5.8,106.7 14.1,115 14.1,117.4 15.61,118.91 IN1.2
1-3
  Top 0.305: RN1.3 9.37,85 SHIFT1.13
  Top 0.406: 17.1,120.1 17.1,117.67 IN1.3
  Top 0.813: RN1.3 4.6,89.77 4.6,107.4 12.6,115.4 12.6,118.3 14.9,120.6 16.6,120.6 17.1,120.1
1-4
  Top 0.305: RN1.2 10.21,83.73 SHIFT1.14
  Top 0.813: RN1.2 3.4,88.43 3.4,108.1 11.1,115.7 11.1,119 14.1,122 17.1,122 18.4,120.9 IN1.4
1-5
  Top 0.305: RN1.6 13.8,92.84 16.3,90.34 16.3,85.54 18.1,83.74 SHIFT1.3
  Bottom 0.406: 18.6,114.5 20.47,116.37 IN1.5
  Bottom 0.813: RN1.6 8.16,92.84 3.3,97.7 3.3,107 9.7,113.4 17.5,113.4 18.6,114.5
1-6
  Top 0.305: RN1.7 12.08,95.38 16.9,90.66 16.9,86.04 18,84.94 20.37,84.94 SHIFT1.4
  Bottom 0.406: 20.1,114.2 20.9,115 21.4,115 22.2,115.8 22.2,117.65 IN1.6
  Bottom 0.813: RN1.7 8.32,95.38 4.7,99 4.7,106.5 10.1,111.9 17.8,111.9 20.1,114.2
1-7
  Top 0.305: RN1.8 10.22,96.84 11.6,96.84 17.5,90.94 17.5,87.04 18.27,86.28 SHIFT1.5
  Bottom 0.813: RN1.8 8.08,97.92 6,100 6,106 10.5,110.5 18.3,110.5 23.48,115.68 IN1.7
1-8
  Top 0.305: RN1.9 11.7,97.91 11.7,97.64 18.1,91.24 18.1,88.14 18.7,87.55 SHIFT1.6
  Bottom 0.406: 24.7,115 24.7,117.69 IN1.8
  Bottom 0.813: RN1.9 7.3,102.31 7.3,105.5 11,109.2 18.9,109.2 24.7,115
2-1
  Top 0.305: RN2.5 19.51,100.65 18.4,99.54 18.4,95.94 20.8,93.54 24.5,93.54 26.4,91.64 27.3,91.64 28.1,90.84 28.1,88.24 27.4,87.54 SHIFT2.11
  Top 0.813: RN2.5 19.51,106.01 20.3,106.8 24.6,106.8 31.7,113.9 31.7,121.7 26.8,126.6 26.8,129.56 IN2.1
2-2
  Top 0.305: RN2.4 17.8,103.86 17.8,95.74 20.6,92.94 22.3,92.94 23.4,91.84 23.4,87.64 24.8,86.24 26.3,86.24 SHIFT2.12
  Top 0.813: RN2.4 16.97,106.27 18.7,108 24,108 30.4,114.4 30.4,121.2 25.2,126.4 25.2,130.5 IN2.2
2-3
  Top 0.305: RN2.3 14.43,104.41 17.2,101.64 17.2,95.54 20.4,92.34 22.1,92.34 22.8,91.64 22.8,87.24 25.1,84.94 26.9,84.94 27,84.84 26.5,84.84 SHIFT2.13
  Top 0.406: 28.1,133.2 28.1,130.92 IN2.3
  Top 0.813: RN2.3 14.43,105.53 18.2,109.3 23.6,109.3 29.2,114.9 29.2,120.6 24,125.8 24,132.3 25.6,133.9 27.4,133.9 28.1,133.2
2-4
  Top 0.305: RN2.2 14.54,102.04 15.7,102.04 16.6,101.14 16.6,95.34 20.2,91.74 21.9,91.74 22.2,91.44 22.2,86.54 25,83.74 SHIFT2.14
  Top 0.813: RN2.2 17.7,110.5 23.1,110.5 28,115.4 28,120 22.7,125.3 22.7,132.7 25.2,135.2 28.3,135.2 29.4,134.1 IN2.4
2-5
  Top 0.305: RN2.6 22.05,102.39 19,99.34 19,96.14 21,94.14 24.7,94.14 26.6,92.24 27.5,92.24 28.7,91.04 28.7,84.64 29.6,83.74 SHIFT2.3
  Bottom 0.813: RN2.6 22.05,105.85 31.94,115.74 IN2.5
2-6
  Top 0.305: RN2.7 24.59,103.03 22.6,101.04 21.5,101.04 19.6,99.14 19.6,96.34 21.2,94.74 24.9,94.74 26.8,92.84 27.7,92.84 29.3,91.24 29.3,85.74 30,85.04 32.45,85.04 SHIFT2.4
  Bottom 0.406: 33.2,128.4 33.2,130.9 IN2.6
  Bottom 0.813: RN2.7 24.59,106.79 33.2,115.4 33.2,128.4
2-7
  Top 0.305: RN2.8 22.88,100.44 21.7,100.44 20.2,98.94 20.2,96.54 21.4,95.34 25.1,95.34 27,93.44 27.9,93.44 29.9,91.44 29.9,86.74 30.4,86.24 32.45,86.24 SHIFT2.5
  Bottom 0.813: RN2.8 27.03,107.53 34.4,115 34.4,129.54 IN2.7 34.5,129.5
2-8
  Top 0.305: RN2.9 24.82,99.84 21.9,99.84 20.8,98.74 20.8,96.74 21.6,95.94 25.3,95.94 27.2,94.04 28.1,94.04 30.5,91.64 30.5,87.84 30.9,87.44 32.38,87.44 SHIFT2.6
  Bottom 0.406: 35.75,128.55 35.75,130.89 IN2.8
  Bottom 0.813: RN2.9 29.67,108.47 35.4,114.3 35.7,114.6 35.75,128.55
3-1
  Top 0.305: RN3.5 32.59,95.15 35.9,91.84 39.3,91.84 40.6,90.54 40.6,88.04 40.1,87.54 SHIFT3.11
  Top 0.813: RN3.5 32.59,99.49 34.9,101.8 34.9,107.2 39.2,111.5 IN3.1
3-2
  Top 0.305: RN3.4 30.05,95.49 31.2,94.34 32.6,94.34 35.4,91.54 35.4,87.74 36.87,86.28 SHIFT3.12
  Top 0.813: RN3.4 30.05,98.55 33.8,102.3 33.8,108.2 37.6,112 37.6,117.3 IN3.2
3-3
  Top 0.305: RN3.3 27.51,97.13 30.9,93.74 32.4,93.74 34.8,91.34 34.8,87.44 37.4,84.84 38.4,84.84 SHIFT3.13
  Top 0.406: 40.5,120.2 40.5,117.62 IN3.3
  Top 0.813: RN3.3 27.64,97.74 27.64,98.74 28.9,100 29.9,100 32.7,102.8 32.7,109.2 36.3,112.8 36.3,118.6 38.5,120.8 39.9,120.8 40.5,120.2
3-4
  Top 0.305: RN3.2 27.47,95.24 28.5,95.24 30.6,93.14 32.2,93.14 34.2,91.14 34.2,87.14 37.7,83.64 38.47,83.64 SHIFT3.14
  Top 0.813: RN3.2 24.97,98.17 28.1,101.3 29.6,101.3 31.6,103.3 31.6,110.1 35,113.5 35,119 38,122 40.5,122 41.7,120.8 41.7,118.96 IN3.4
3-5
  Top 0.305: RN3.6 35.13,93.41 36.1,92.44 39.5,92.44 41.2,90.74 41.2,84.94 42.5,83.64 44.62,83.64 SHIFT3.3
  Bottom 0.813: IN3.5 40.62,112.7 36.3,112.7 31.4,107.8 31.4,101.9 35.13,98.17 RN3.6
3-6
  Top 0.305: RN3.7 37.67,95.07 41.8,90.94 41.8,86.34 43.1,85.04 44.68,85.04 SHIFT3.4
  Bottom 0.406: 45.6,115.3 45.6,117.6 IN3.6
  Bottom 0.813: RN3.7 37.67,99.13 36.8,100 35,100 32.6,102.4 32.6,107.3 36.8,111.5 41.2,111.5 44.1,114.4 44.7,114.4 45.6,115.3
3-7
  Top 0.305: RN3.8 40.21,93.33 42.4,91.14 42.4,87.44 43.6,86.24 44.68,86.24 SHIFT3.5
  Bottom 0.813: RN3.8 40.21,98.69 37.6,101.3 35.4,101.3 33.8,102.9 33.8,106.8 37.3,110.3 41.7,110.3 44.6,113.2 45.5,113.2 46.83,114.63 IN3.7
3-8
  Top 0.305: RN3.9 42.75,91.59 43,91.34 43,88.24 43.7,87.54 SHIFT3.6
  Bottom 0.406: 48.1,115.2 48.1,117.64 IN3.8
  Bottom 0.813: RN3.9 42.75,98.15 38.3,102.6 35.8,102.6 35,103.4 35,106.3 37.8,109.1 42.2,109.1 45.1,112 46.1,112 48.1,114 48.1,115.2
4-1
  Top 0.305: RN4.5 46.7,104.58 46.7,95.54 48.9,93.34 50.8,93.34 52.7,91.44 52.7,88.04 52.2,87.54 SHIFT4.11
  Top 0.813: RN4.5 46.86,107.36 47.5,108 49.3,108 55,113.7 55,122.37 50.52,126.85 IN4.1
4-2
  Top 0.305: RN4.4 46.1,102.96 46.1,94.14 47.7,92.54 47.7,87.24 48.7,86.24 50.67,86.24 SHIFT4.12
  Top 0.813: RN4.4 44.32,108.12 45.3,109.1 48.6,109.1 53.8,114.3 53.8,121.7 48.6,126.9 48.6,130.27 IN4.2
4-3
  Top 0.305: RN4.3 43.78,102.74 44.9,102.74 45.5,102.14 45.5,93.94 47.1,92.34 47.1,87.04 49.1,85.04 50.67,85.04 SHIFT4.13
  Top 0.406: 51.8,133.2 51.8,130.91 IN4.3
  Top 0.813: RN4.3 41.78,107.28 44.7,110.2 48,110.2 52.6,114.8 52.6,121 47.4,126.2 47.4,131.5 49.8,133.9 51.1,133.9 51.8,133.2
4-4
  Top 0.305: RN4.2 41.84,102.14 44.6,102.14 44.9,101.84 44.9,93.74 46.5,92.14 46.5,86.84 49.5,83.84 50.6,83.84 SHIFT4.14
  Top 0.813: RN4.2 39.24,106.34 44.2,111.3 47.4,111.3 51.4,115.3 51.4,120.5 46.2,125.7 46.2,132 49.3,135.1 51.8,135.1 53.06,134.04 IN4.4
4-5
  Top 0.305: RN4.6 49.4,101.94 47.3,99.84 47.3,95.74 49.1,93.94 51,93.94 53.3,91.64 53.3,85.84 55.4,83.74 SHIFT4.3
  Bottom 0.813: RN4.6 49.4,107.2 55.6,113.4 IN4.5
4-6
  Top 0.305: RN4.7 51.94,103.68 47.9,99.64 47.9,95.94 49.3,94.54 51.2,94.54 53.9,91.84 53.9,86.64 55.5,85.04 56.82,85.04 SHIFT4.4
  Bottom 0.406: 56.9,128.4 56.9,130.89 IN4.6
  Bottom 0.813: RN4.7 51.94,108.04 56.8,112.9 56.8,128.3 56.9,128.4
4-7
  Top 0.305: RN4.8 54.48,102.82 53.4,101.74 50.8,101.74 48.5,99.44 48.5,96.14 49.5,95.14 51.4,95.14 54.5,92.04 54.5,87.44 55.7,86.24 56.82,86.24 SHIFT4.5
  Bottom 0.813: RN4.8 54.48,108.88 58,112.4 58,129.51 IN4.7
4-8
  Top 0.305: RN4.9 57.02,103.16 55,101.14 51,101.14 49.1,99.24 49.1,96.34 49.7,95.74 51.6,95.74 55.1,92.24 55.1,88.54 56.09,87.55 SHIFT4.6
  Bottom 0.406: 59.4,128.5 59.4,130.93 IN4.8
  Bottom 0.813: RN4.9 57.02,109.62 59.3,111.9 59.3,128.4 59.4,128.5
5-1
  Top 0.305: RN5.5 61.06,97.48 64.7,93.84 64.7,88.54 63.7,87.55 SHIFT5.11
  Top 0.813: RN5.5 61.06,100.46 62.7,102.1 62.7,116.26 IN5.1
5-2
  Top 0.305: RN5.4 59.9,96.36 59.9,87.74 61.37,86.28 SHIFT5.12
  Top 0.813: RN5.4 58.52,99.72 61.4,102.6 61.4,117.5 IN5.2
5-3
  Top 0.305: RN5.3 57.98,95.74 58.5,95.74 59.3,94.94 59.3,87.44 61.73,85 SHIFT5.13
  Top 0.406: 64.1,120.2 64.1,117.66 IN5.3
  Top 0.813: RN5.3 55.98,98.88 60.2,103.1 60.2,119 62.1,120.9 63.4,120.9 64.1,120.2
5-4
  Top 0.305: RN5.2 56.14,95.04 57.9,95.04 58.7,94.24 58.7,87.04 62.01,83.73 SHIFT5.14
  Top 0.813: RN5.2 53.44,99.44 53.9,99.9 55.4,99.9 59,103.5 59,120.2 61.1,122.3 64.3,122.3 65.4,121.2 65.4,118.96 IN5.4
5-5
  Top 0.305: RN5.6 63.6,96.24 65.3,94.54 65.3,86.44 68,83.74 SHIFT5.3
  Bottom 0.61: 58.8,101.4 58.8,100.9 59.9,99.8 62.5,99.8 63.6,98.7 RN5.6
  Bottom 0.813: 58.8,101.4 58.8,107.5 63.5,112.2 65.2,112.2 67.9,114.9 IN5.5
5-6
  Top 0.305: RN5.7 65.9,97.5 65.9,87.04 68,84.94 68.93,84.94 SHIFT5.4
  Bottom 0.406: 69.2,115.2 69.2,117.64 IN5.6
  Bottom 0.61: 60,102 60,101.2 60.4,100.8 63.8,100.8 66.1,98.5 66.1,97.78 RN5.7
  Bottom 0.813: 60,102 60,107.1 63.8,110.9 65.5,110.9 69.2,114.6 69.2,115.2
5-7
  Top 0.305: RN5.8 68.68,95.02 66.5,92.84 66.5,87.64 67.9,86.24 68.96,86.24 SHIFT5.5
  Bottom 0.61: 61.2,102.8 61.2,102.2 61.6,101.8 65.2,101.8 68.7,98.4 68.7,97.82 RN5.8
  Bottom 0.813: 61.2,102.8 61.2,106.6 64.2,109.6 65.9,109.6 70.4,114.1 70.4,116.34 IN5.7
5-8
  Top 0.305: RN5.9 71.22,96.66 67.1,92.54 67.1,88.34 67.9,87.54 SHIFT5.6
  Bottom 0.406: IN5.8 71.7,117.68 71.7,115.2
  Bottom 0.61: 62.4,103.3 63,102.8 66.16,102.8 RN5.9
  Bottom 0.813: 71.7,115.2 71.7,113.7 66.3,108.3 64.6,108.3 62.4,106.1 62.4,103.3
6-1
  Top 0.305: RN6.5 74.7,104.7 74.7,95.74 76.7,93.74 76.7,88.24 76,87.54 SHIFT6.11
  Top 0.813: RN6.5 74.61,109.41 78.6,113.4 78.6,122 73.89,126.71 IN6.1
6-2
  Top 0.305: RN6.4 72.07,104.27 74.1,102.24 74.1,92.44 73.7,92.04 72.5,92.04 72,91.54 72,87.74 73.5,86.24 74.95,86.24 SHIFT6.12
  Top 0.813: RN6.4 72.07,108.67 77.4,114 77.4,121.3 71.8,126.9 71.8,130.09 IN6.2
6-3
  Top 0.305: RN6.3 69.53,104.11 71.3,102.34 73.2,102.34 73.5,102.04 73.5,92.94 73.2,92.64 72.3,92.64 71.4,91.74 71.4,87.44 73.8,85.04 74.95,85.04 SHIFT6.13
  Top 0.406: 75.2,133.3 75.2,130.87 IN6.3
  Top 0.813: RN6.3 69.53,107.93 76.2,114.6 76.2,120.7 70.5,126.4 70.5,131.2 73,133.7 74.7,133.7 75.2,133.3
6-4
  Top 0.305: RN6.2 66.99,104.05 69.3,101.74 72.8,101.74 72.9,101.64 72.9,93.44 72.7,93.24 72.1,93.24 70.8,91.94 70.8,86.94 74.1,83.64 74.89,83.64 SHIFT6.14
  Top 0.813: RN6.2 66.99,107.19 75,115.2 75,120.1 69,126.1 69,131.9 72.2,135.1 75.4,135.1 76.5,134 76.5,132.25 IN6.4
6-5
  Top 0.305: RN6.6 77.15,103.89 75.3,102.04 75.3,95.94 77.3,93.94 77.3,84.44 78,83.64 81.04,83.64 SHIFT6.3
  Bottom 0.813: RN6.6 77.15,106.85 79,108.7 79,129.67 IN6.5
6-6
  Top 0.305: RN6.7 79.69,103.43 79.1,102.84 78,102.84 75.9,100.74 75.9,96.14 77.9,94.14 77.9,85.84 78.7,85.04 81.1,85.04 SHIFT6.4
  Bottom 0.406: 80.2,128.5 80.2,130.95 IN6.6
  Bottom 0.813: RN6.7 79.69,107.29 80.2,107.8 80.2,128.5
6-7
  Top 0.305: RN6.8 82.23,104.27 79.9,101.94 78.2,101.94 76.5,100.24 76.5,96.34 78.5,94.34 78.5,87.24 79.47,86.28 SHIFT6.5
  Bottom 0.813: RN6.8 81.51,105.51 IN6.7
6-8
  Top 0.305: RN6.9 84.77,104.71 81.2,101.14 78.4,101.14 77.1,99.84 77.1,96.54 79.1,94.54 79.1,88.24 79.8,87.55 SHIFT6.6
  Bottom 0.406: 82.8,128.6 82.8,130.89 IN6.8
  Bottom 0.813: RN6.9 84.77,105.93 82.8,107.9 82.8,128.6
7-1
  Top 0.305: RN7.5 89.13,88.47 88.2,87.54 SHIFT7.11
  Top 0.813: RN7.5 89.13,100.73 90.4,102 90.4,112.24 IN7.1
7-2
  Top 0.305: RN7.4 86.59,93.33 84.1,90.84 84.1,87.94 85.77,86.28 SHIFT7.12
  Top 0.813: RN7.4 86.59,99.89 89.1,102.4 89.1,111.1 84.4,115.8 84.4,117.34 IN7.2
7-3
  Top 0.305: RN7.3 83.5,97.19 83.5,87.44 85.94,85 SHIFT7.13
  Top 0.406: 87.4,120.3 87.4,117.78 IN7.3
  Top 0.813: RN7.3 84.05,99.15 87.8,102.9 87.8,110.6 83.2,115.2 83.2,118.7 85.4,120.9 86.8,120.9 87.4,120.3
7-4
  Top 0.305: RN7.2 82.9,96.35 82.9,86.84 86,83.74 SHIFT7.14
  Top 0.813: RN7.2 81.51,98.41 86.5,103.4 86.5,110 82,114.6 82,119.2 85,122.2 87.9,122.2 88.7,121.4 88.7,119.1 IN7.4
7-5
  Top 0.305: RN7.6 91.67,95.71 89.7,93.74 89.7,86.24 92.2,83.74 SHIFT7.3
  Bottom 0.61: 86.8,101.5 88.5,99.8 90.9,99.8 91.67,99.03 RN7.6
  Bottom 0.813: 86.8,101.5 86.8,112.12 IN7.5
7-6
  Top 0.305: RN7.7 94.21,95.95 93.5,95.24 92.2,95.24 90.3,93.34 90.3,87.04 92.3,85.04 93.24,85.04 SHIFT7.4
  Bottom 0.406: IN7.6 92.5,117.76 92.5,115.6
  Bottom 0.61: 88,102.7 88,101.7 88.9,100.8 91.9,100.8 94.2,98.5 RN7.7
  Bottom 0.813: 92.5,115.6 88,111.1 88,102.7
7-7
  Top 0.305: RN7.8 96.75,96.59 94.5,94.34 92.4,94.34 90.9,92.84 90.9,87.64 92.2,86.34 93.21,86.34 SHIFT7.5
  Bottom 0.61: 89.2,103.9 89.2,102.2 89.6,101.8 93.1,101.8 94.7,100.2 95.9,100.2 96.7,99.4 96.7,97.79 RN7.8
  Bottom 0.813: IN7.7 93.74,115.04 89.2,110.5 89.2,103.9
7-8
  Top 0.305: SHIFT7.6 92.39,87.55 91.5,88.44 91.5,92.44 92.6,93.54 95.74,93.54 99.3,97.1 RN7.9
  Bottom 0.406: IN7.8 93.9,119 95,117.9 95,115.5
  Bottom 0.61: 90.4,104.9 90.4,103.5 91.1,102.8 93.6,102.8 95.2,101.2 97.5,101.2 99.3,99.4 RN7.9
  Bottom 0.813: 95,115.5 95,114.4 90.4,109.8 90.4,104.9
8-1
  Top 0.305: RN8.5 102.16,103.38 104,101.54 104,95.74 101.1,92.84 101.1,88.24 100.4,87.54 SHIFT8.11
  Top 0.813: RN8.5 102.16,109.76 102,110 102,122.43 97.91,126.52 IN8.1
8-2
  Top 0.305: RN8.4 99.85,104.89 103.4,101.34 103.4,96.04 100.5,93.14 98.6,93.14 96.3,90.84 96.3,87.54 97.5,86.34 99.2,86.34 SHIFT8.12
  Top 0.813: RN8.4 99.62,109.72 100.7,110.8 100.7,121.7 96.3,126.1 96.3,130.85 IN8.2
8-3
  Top 0.305: RN8.3 97.08,104.26 98.5,102.84 101.1,102.84 102.8,101.14 102.8,96.34 100.2,93.74 98.4,93.74 95.7,91.04 95.7,87.24 97.9,85.04 99.23,85.04 SHIFT8.13
  Top 0.406: 99.2,133.7 99.2,131.17 IN8.3
  Top 0.813: RN8.3 97.08,109.08 99.5,111.5 99.5,121 95,125.5 95,132.2 97,134.1 98.8,134.1 99.2,133.7
8-4
  Top 0.305: RN8.2 97.19,102.24 100.9,102.24 102.2,100.94 102.2,96.54 100,94.34 98.2,94.34 95.1,91.24 95.1,86.94 98.31,83.73 SHIFT8.14
  Top 0.813: RN8.2 94.54,108.34 98.3,112.1 98.3,120.5 93.7,125.1 93.7,132.7 96.4,135.4 99.9,135.4 100.4,134.9 100.4,132.51 IN8.4
8-5
  Top 0.305: RN8.6 104.6,104.79 104.6,95.44 101.7,92.54 101.7,85.84 103.9,83.64 105.32,83.64 SHIFT8.3
  Bottom 0.813: RN8.6 104.7,108.8 102.9,110.6 102.9,129.83 IN8.5
8-6
  Top 0.305: RN8.7 107.24,103.58 105.2,101.54 105.2,95.24 102.3,92.34 102.3,86.64 103.83,85.11 SHIFT8.4
  Bottom 0.406: 104.2,128.7 104.2,131.25 IN8.6
  Bottom 0.813: RN8.7 107.24,108.16 104.3,111.1 104.3,128.6 104.2,128.7
8-7
  Top 0.305: RN8.8 109.78,104.52 107.2,101.94 106.7,101.94 105.8,101.04 105.8,95.04 102.9,92.14 102.9,87.24 103.9,86.24 105.38,86.24 SHIFT8.5
  Bottom 0.813: RN8.8 109.78,107.42 105.53,111.67 IN8.7
8-8
  Top 0.305: RN8.9 108.67,101.24 106.9,101.24 106.4,100.74 106.4,94.84 103.5,91.94 103.5,88.34 104.3,87.54 SHIFT8.6
  Bottom 0.406: 106.8,128.7 106.8,131.19 IN8.8
  Bottom 0.813: RN8.9 112.32,106.68 106.8,112.2 106.8,128.7
9-1
  Top 0.305: RN9.5 118.3,96.74 113.4,91.84 113.4,88.24 112.6,87.44 111.51,87.44 SHIFT9.11
  Top 0.813: RN9.5 118.3,101.4 118.4,101.5 118.4,108.28 IN9.1
9-2
  Top 0.305: RN9.4 115.76,95.4 112.6,92.24 109.6,92.24 108.4,91.04 108.4,87.74 109.9,86.24 111.37,86.24 SHIFT9.12
  Top 0.813: RN9.4 115.76,100.96 117,102.2 117,107.8 110.1,114.7 109.4,114.7 108.4,115.7 108.4,117.2 IN9.2
9-3
  Top 0.305: RN9.3 113.22,95.46 111.4,93.64 110,93.64 107.8,91.44 107.8,87.34 110.1,85.04 111.37,85.04 SHIFT9.13
  Top 0.406: 111.5,120.3 111.5,117.72 IN9.3
  Top 0.813: RN9.3 113.22,100.52 115.5,102.8 115.5,107.4 109.5,113.4 108.8,113.4 107.1,115.1 107.1,118.5 109.5,120.9 110.9,120.9 111.5,120.3
9-4
  Top 0.305: RN9.2 110.68,95.32 107.2,91.74 107.2,86.64 110,83.84 SHIFT9.14
  Top 0.813: RN9.2 110.68,99.98 114.1,103.4 114.1,106.8 108.8,112.1 108.1,112.1 105.8,114.4 105.8,119.1 109.1,122.4 111.6,122.4 112.7,121.3 112.7,119.06 IN9.4
9-5
  Top 0.305: RN9.6 120.84,96.38 118.3,93.84 116.2,93.84 114,91.64 114,86.24 116.5,83.74 SHIFT9.3
  Bottom 0.61: 115.3,102.1 115.3,101.3 116.4,100.1 119.6,100.1 120.8,99 120.8,98.08 RN9.6
  Bottom 0.813: IN9.5 115.29,107.89 115.3,106.5 115.3,102.1
9-6
  Top 0.305: RN9.7 123.38,95.62 122.9,95.14 120.4,95.14 118.5,93.24 116.4,93.24 114.6,91.44 114.6,86.94 116.5,85.04 117.52,85.04 SHIFT9.4
  Bottom 0.406: IN9.6 116.6,117.7 116.6,115.6
  Bottom 0.61: 116.6,102.6 116.6,101.7 117.4,101 120.5,101 121.5,100 122.5,100 123.4,99.1 123.4,98.06 RN9.7
  Bottom 0.813: 116.6,115.6 116.6,102.6
9-7
  Top 0.305: RN9.8 125.92,96.36 124.1,94.54 120.6,94.54 118.7,92.64 116.6,92.64 115.2,91.24 115.2,87.54 116.5,86.24 117.52,86.24 SHIFT9.5
  Bottom 0.61: 117.8,103.2 117.8,102.5 118.4,101.9 121.2,101.9 122,101.1 123.8,101.1 125.9,99 125.9,98.06 RN9.8
  Bottom 0.813: IN9.7 117.83,106.83 117.8,105.5 117.8,103.2
9-8
  Top 0.305: RN9.9 128.4,98.04 124.2,93.84 120.8,93.84 119,92.04 116.8,92.04 115.8,91.04 115.8,88.24 116.5,87.55 SHIFT9.6
  Bottom 0.406: IN9.8 119.1,117.74 119.1,115.6
  Bottom 0.61: 119.1,104 119.1,103.7 120,102.8 121.8,102.8 122.5,102.1 124.3,102.1 126.2,100.2 127.3,100.2 128.5,99 128.5,98.08 RN9.9
  Bottom 0.813: 119.1,115.6 119.1,104
10-1
  Top 0.305: RN10.5 131.21,103.53 132.7,102.04 132.7,97.14 130.1,94.54 128.1,94.54 125.4,91.84 125.4,88.24 124.7,87.55 SHIFT10.11
  Top 0.813: RN10.5 131.21,106.89 125.9,112.2 125.9,122.47 121.82,126.55 IN10.1
10-2
  Top 0.305: RN10.4 132.1,101.46 132.1,97.34 129.9,95.14 127.9,95.14 124.8,92.04 121.4,92.04 120.6,91.24 120.6,87.84 122.2,86.24 123.51,86.24 SHIFT10.12
  Top 0.813: RN10.4 128.67,107.33 124.7,111.3 124.7,121.8 120,126.5 120,130.27 IN10.2
10-3
  Top 0.305: RN10.3 128.08,102.94 129.8,102.94 131.5,101.24 131.5,97.54 129.7,95.74 127.7,95.74 124.6,92.64 121.2,92.64 120,91.44 120,87.34 122.3,85.04 123.51,85.04 SHIFT10.13
  Top 0.406: 123.1,133.3 123.1,130.81 IN10.3
  Top 0.813: RN10.3 126.13,107.87 123.5,110.5 123.5,121.2 118.7,126 118.7,131.4 121.4,134.1 122.3,134.1 123.1,133.3
10-4
  Top 0.305: RN10.2 126.14,102.34 129.4,102.34 130.9,100.84 130.9,97.74 129.5,96.34 127.5,96.34 124.4,93.24 121,93.24 119.4,91.64 119.4,87.04 122.7,83.73 SHIFT10.14
  Top 0.813: RN10.2 123.59,108.51 122.3,109.8 122.3,120.6 117.4,125.5 117.4,131.9 120.9,135.4 123.2,135.4 124.3,134.3 124.3,132.15 IN10.4
10-5
  Top 0.305: RN10.6 133.75,101.19 133.3,100.74 133.3,96.94 130.3,93.94 128.3,93.94 126,91.64 126,86.24 128.5,83.74 SHIFT10.3
  Bottom 0.813: RN10.6 133.75,105.95 126.9,112.8 IN10.5
10-6
  Top 0.305: RN10.7 136.29,102.93 133.9,100.54 133.9,96.74 130.5,93.34 128.5,93.34 126.6,91.44 126.6,86.74 128.4,84.94 129.63,84.94 SHIFT10.4
  Bottom 0.406: 128.2,128.3 128.2,130.79 IN10.6
  Bottom 0.813: RN10.7 136.29,105.51 128.2,113.6 128.2,128.3
10-7
  Top 0.305: RN10.8 138.83,104.57 134.5,100.24 134.5,96.54 130.7,92.74 128.7,92.74 127.2,91.24 127.2,87.54 128.5,86.24 129.66,86.24 SHIFT10.5
  Bottom 0.813: RN10.8 138.83,105.47 129.44,114.86 IN10.7
10-8
  Top 0.305: RN10.9 141.37,104.31 139.4,102.34 137.5,102.34 135.1,99.94 135.1,96.34 130.9,92.14 128.9,92.14 127.8,91.04 127.8,88.34 128.6,87.54 SHIFT10.6
  Bottom 0.406: 130.7,128.4 130.7,130.83 IN10.8
  Bottom 0.813: RN10.9 141.37,105.83 139.7,107.5 138.9,107.5 130.7,115.7 130.7,128.4
11-1
  Top 0.305: RN11.5 144.97,96.54 143.4,96.54 142.2,95.34 139.4,95.34 137.5,93.44 137.5,88.14 136.9,87.54 SHIFT11.11
  Top 0.813: RN11.5 146.8,98.44 146.8,108.1 140.8,114 137.44,114 IN11.1
11-2
  Top 0.305: RN11.4 141.83,95.94 139.1,95.94 135.9,92.74 133.9,92.74 132.7,91.54 132.7,87.64 134.06,86.28 SHIFT11.12
  Top 0.813: RN11.4 144.33,101.33 145.6,102.6 145.6,107.5 140.3,112.8 136.2,112.8 133.2,115.8 133.2,117.56 IN11.2
11-3
  Top 0.305: RN11.3 139.89,96.54 138.9,96.54 135.7,93.34 133.7,93.34 132.1,91.74 132.1,87.24 134.34,85 SHIFT11.13
  Top 0.406: 136.1,120.5 136.1,117.98 IN11.3
  Top 0.813: RN11.3 141.79,100.49 144.4,103.1 144.4,106.8 139.6,111.6 135.5,111.6 131.9,115.2 131.9,119.1 133.7,120.9 135.7,120.9 136.1,120.5
11-4
  Top 0.305: RN11.2 139.25,97.69 135.5,93.94 133.5,93.94 131.5,91.94 131.5,86.84 134.6,83.74 SHIFT11.14
  Top 0.813: RN11.2 139.25,99.65 143.2,103.6 143.2,106.2 139,110.4 134.9,110.4 130.6,114.7 130.6,119.7 133.3,122.4 136.6,122.4 137.5,121.5 137.5,119.32 IN11.4
11-5
  Top 0.305: RN11.6 147.51,96.54 146.1,96.54 145.5,95.94 143.7,95.94 142.5,94.74 139.6,94.74 138.1,93.24 138.1,84.84 139.21,83.73 SHIFT11.3
  Bottom 0.61: 143.2,103.5 143.2,102.8 145.6,100.4 148.4,100.4 149.5,99.3 149.5,98.53 RN11.6
  Bottom 0.813: IN11.5 139.94,109.76 143.2,106.5 143.2,103.5
11-6
  Top 0.305: RN11.7 150.15,96.64 148.8,96.64 148.1,95.94 146.4,95.94 145.8,95.34 144,95.34 142.8,94.14 139.8,94.14 138.7,93.04 138.7,85.94 139.63,85 SHIFT11.4
  Bottom 0.406: IN11.6 141.2,117.96 141.2,115.6
  Bottom 0.61: 144.4,103.5 144.4,103 146.1,101.3 150.9,101.3 152,100.2 152,98.49 RN11.7
  Bottom 0.813: 141.2,115.6 141.2,110.3 144.4,107.1 144.4,103.5
11-7
  Top 0.305: SHIFT11.5 139.87,86.28 139.3,86.84 139.3,92.84 140,93.54 143,93.54 144.2,94.74 146,94.74 146.6,95.34 148.3,95.34 149,96.04 150.7,96.04 151.3,96.64 152.9,96.64 154.3,98.04 RN11.8
  Bottom 0.61: 145.6,103.6 145.6,103.2 146.6,102.2 152.5,102.2 154.5,100.2 RN11.8
  Bottom 0.813: IN11.7 142.48,110.82 145.6,107.7 145.6,103.6
11-8
  Top 0.305: RN11.9 154.63,96.04 151.6,96.04 151,95.44 149.2,95.44 148.5,94.74 146.8,94.74 146.2,94.14 144.4,94.14 142.6,92.34 140.3,92.34 139.9,91.94 139.9,88.14 140.5,87.55 SHIFT11.6
  Bottom 0.406: IN11.8 143.8,117.9 143.8,115.6
  Bottom 0.61: 146.8,103.7 147.4,103.1 153.4,103.1 156.9,99.6 156.9,98.57 RN11.9
  Bottom 0.813: 143.8,115.6 143.8,111.3 146.8,108.3 146.8,103.7
12-1
  Top 0.305: SHIFT12.11 150,87.55 150.8,88.34 150.8,91.84 152.6,93.64 158.04,93.64 158.5,94.1
  Top 0.406: RN12.5 158.86,104.54 160.4,103 161.6,103 163.2,101.4 163.2,98.8 158.5,94.1
  Top 0.813: RN12.5 158.86,107.04 150.5,115.4 150.5,122.43 145.97,126.96 IN12.1
12-2
  Top 0.305: SHIFT12.12 148.89,86.24 147.7,86.24 146,87.94 146,91.44 147.5,92.94 151.1,92.94 152.4,94.24 157.64,94.24 158.1,94.7
  Top 0.406: RN12.4 156.32,104.98 158.2,103.1 159.2,103.1 160.1,102.2 161.1,102.2 162.2,101.1 162.2,98.8 158.1,94.7
  Top 0.813: RN12.4 156.32,107.68 149.3,114.7 149.3,121.8 144.3,126.8 144.3,130.33 IN12.2
12-3
  Top 0.305: SHIFT12.13 148.89,85.04 147.9,85.04 145.4,87.54 145.4,91.64 147.3,93.54 150.9,93.54 152.2,94.84 157.24,94.84 157.6,95.2
  Top 0.406: 147.2,133.2 147.2,130.77 IN12.3 | RN12.3 155.72,103.1 157,103.1 157.8,102.3 158.8,102.3 159.8,101.3 160.8,101.3 161.3,100.8 161.3,98.9 157.6,95.2
  Top 0.61: 153.8,105.02 RN12.3
  Top 0.813: RN12.3 153.78,108.32 148.1,114 148.1,121.2 143.1,126.3 143.1,131.6 145.3,133.8 146.6,133.8 147.2,133.2
12-4
  Top 0.305: SHIFT12.14 148.83,83.64 148.2,83.64 144.8,87.04 144.8,91.84 147.1,94.14 150.6,94.14 151.9,95.44 156.74,95.44 157.1,95.8
  Top 0.406: RN12.2 153.28,103 154.5,103 155.2,102.3 156.6,102.3 157.4,101.5 158.4,101.5 159.4,100.5 160.4,100.5 160.5,100.4 160.5,99.2 157.1,95.8
  Top 0.61: 151.2,105 RN12.2
  Top 0.813: RN12.2 151.34,108.96 146.9,113.4 146.9,120.7 141.9,125.7 141.9,132.6 144.6,135.3 147.8,135.3 148.6,134.5 148.6,132.09 IN12.4
12-5
  Top 0.305: SHIFT12.3 154.98,83.64 152.1,83.64 151.4,84.34 151.4,91.64 152.9,93.04 158.44,93.04 158.8,93.4
  Top 0.406: RN12.6 161.4,104.8 164.3,101.9 164.3,98.9 158.8,93.4
  Bottom 0.813: RN12.6 161.4,107 160.6,107.8 154.6,107.8 151,111.4 151,129.41 IN12.5
12-6
  Top 0.305: SHIFT12.4 155.04,85.04 152.7,85.04 152,85.74 152,91.34 153.1,92.44 158.84,92.44 159.2,92.8
  Top 0.406: RN12.7 163.94,104.56 165.3,103.2 165.3,98.9 159.2,92.8
  Bottom 0.406: IN12.6 152.3,130.75 152.3,128.3
  Bottom 0.813: RN12.7 163.94,106.66 161.5,109.1 155.2,109.1 152.2,112.1 152.2,128.2 152.3,128.3
12-7
  Top 0.305: SHIFT12.5 155.04,86.24 153.2,86.24 152.6,86.84 152.6,91.04 153.4,91.84 159.24,91.84 159.6,92.2
  Top 0.406: RN12.8 166.48,99.08 159.6,92.2
  Top 0.61: 166.7,104.82 RN12.8
  Bottom 0.813: RN12.8 166.48,106.22 162.2,110.5 155.7,110.5 153.5,112.7 153.5,129.37 IN12.7
12-8
  Top 0.305: SHIFT12.6 153.69,87.55 153.2,88.04 153.2,90.74 153.7,91.24 159.64,91.24 160.1,91.7 | 167.42,99.02 167.42,102.42 169.1,104.1 169.1,104.96 RN12.9
  Top 0.406: 160.1,91.7 167.42,99.02
  Top 0.61: 169,105.02 RN12.9
  Bottom 0.406: IN12.8 154.9,130.69 154.9,128.2
  Bottom 0.813: RN12.9 169.02,105.78 162.9,111.9 156.3,111.9 154.9,113.3 154.9,128.2
13-1  (via drill 0.6)
  Top 0.305: v163.3,93.34 163.3,88.54 162.3,87.54 SHIFT13.11
  Top 0.813: RN13.5 173.58,91.78 179,97.2 179,110.5 174.6,114.9 174.6,121.9 171.1,125.4 159.7,125.4 156.6,122.3 156.6,118.44 IN13.1
  Bottom 0.305: RN13.5 172.26,91.14 164.7,91.14 163.3,92.54 v163.3,93.34
13-2  (via drill 0.6)
  Top 0.305: v164.6,93.34 164.6,92.24 163.9,91.54 163.9,87.64 162.5,86.24 161.1,86.24 SHIFT13.12
  Top 0.813: RN13.4 173.72,94.32 177.7,98.3 177.7,109.6 173.1,114.2 173.1,121.4 170.4,124.1 160.4,124.1 158.1,121.8 158.1,119.48 IN13.2
  Bottom 0.305: RN13.4 172.78,94.32 170.2,91.74 165.1,91.74 164.6,92.24 v164.6,93.34
13-3  (via drill 0.6)
  Top 0.305: v165.9,93.34 165.9,92.74 164.5,91.34 164.5,87.24 162.3,85.04 161.1,85.04 SHIFT13.13
  Top 0.406: 159.5,120.7 159.5,118.08 IN13.3
  Top 0.813: RN13.3 173.66,96.86 176.4,99.6 176.4,108.7 171.7,113.4 171.7,120.7 169.6,122.8 161.1,122.8 159.5,121.2 159.5,120.7
  Bottom 0.305: RN13.3 172.9,96.84 168.4,92.34 166.6,92.34 165.9,93.04 v165.9,93.34
13-4  (via drill 0.6)
  Top 0.305: v167.2,93.34 167.2,93.24 165.1,91.14 165.1,86.44 162.4,83.74 SHIFT13.14
  Top 0.813: RN13.2 173.8,99.4 175.2,100.8 175.2,107.9 170.3,112.8 170.3,120.1 168.9,121.5 162.2,121.5 160.78,120.08 IN13.4
  Bottom 0.305: RN13.2 167.2,93.7 v167.2,93.34
13-5  (via drill 0.6)
  Top 0.305: SHIFT13.3 168.41,83.73 168.9,83.24 168.9,80.84 167.5,79.44 v167.5,79.24
  Bottom 0.305: RN13.6 171,87.34 171,86.14 167.5,82.64 v167.5,79.24
  Bottom 0.813: RN13.6 174.04,89.24 175.1,90.3 175.1,104.1 165.9,113.3 165.2,113.3 163.3,115.2 163.3,116.78 IN13.5
13-6  (via drill 0.6)
  Top 0.305: v168.8,79.24 168.8,79.94 169.5,80.64 169.5,84.54 169,85.04 167.25,85.04 SHIFT13.4
  Bottom 0.305: RN13.7 168.8,82.6 v168.8,79.24
  Bottom 0.406: 167.1,113.7 165.9,114.9 165.3,114.9 164.6,115.6 164.6,118.06 IN13.6
  Bottom 0.813: RN13.7 173.3,86.7 176.3,89.7 176.3,104.6 167.1,113.7
13-7  (via drill 0.6)
  Top 0.305: v170.1,79.24 170.1,85.34 169.1,86.34 167.28,86.34 SHIFT13.5
  Bottom 0.305: RN13.8 170.1,81.36 v170.1,79.24
  Bottom 0.406: 165.86,116.44 IN13.7 165.86,115.94 166.3,115.5 166.7,115.5 168.3,114.1
  Bottom 0.813: RN13.8 177.5,88.76 177.5,105.1 168.3,114.1
13-8  (via drill 0.6)
  Top 0.305: v171.4,79.24 171,79.64 171,85.34 168.79,87.55 SHIFT13.6
  Bottom 0.305: RN13.9 171.4,80.12 v171.4,79.24 | IN13.8 167.13,118.07
  Bottom 0.406: 169.5,114.6 168.7,115.4 167.9,115.4 167.1,116.2 167.1,116.4 167.13,116.43 167.13,118.07
  Bottom 0.813: RN13.9 178.8,87.52 178.8,105.5 169.5,114.6
+3V3  (via drill 0.6)
  Top 0.61: IC1.P$57 IC1.P$56 IC1.P$55
  Top 0.813: v33.7,12.85 v38.35,12.85 | U$4.CHPD 50.83,14.41 49.27,12.85 44.43,12.85 43.62,12.04
  Top 1.27: IC1.P$56 30.42,54.88 31.49,55.95 v37.9,55.95
  Top 1.676: v39.7,25.74 45,20.44 45,13.54 43.55,12.09 | 43.55,12.09 43.42,11.96 U$2.VOUT | 43.62,12.04 43.57,12.09 43.55,12.09